# Altium PCB AudioBoxV2.PcbDoc
Units mil, origin at the board's own origin, x right, y up, seen from the top; angles counter-clockwise.
Board outline 3662 x 3550 mil, 4 copper layers (Top Layer, GND_2, VCC3, Bottom Layer), stack 23.756 mil thick; 185 components, 105 nets, 569 pads, 46 vias.
Unrouted connection lines stored in the file: 215.
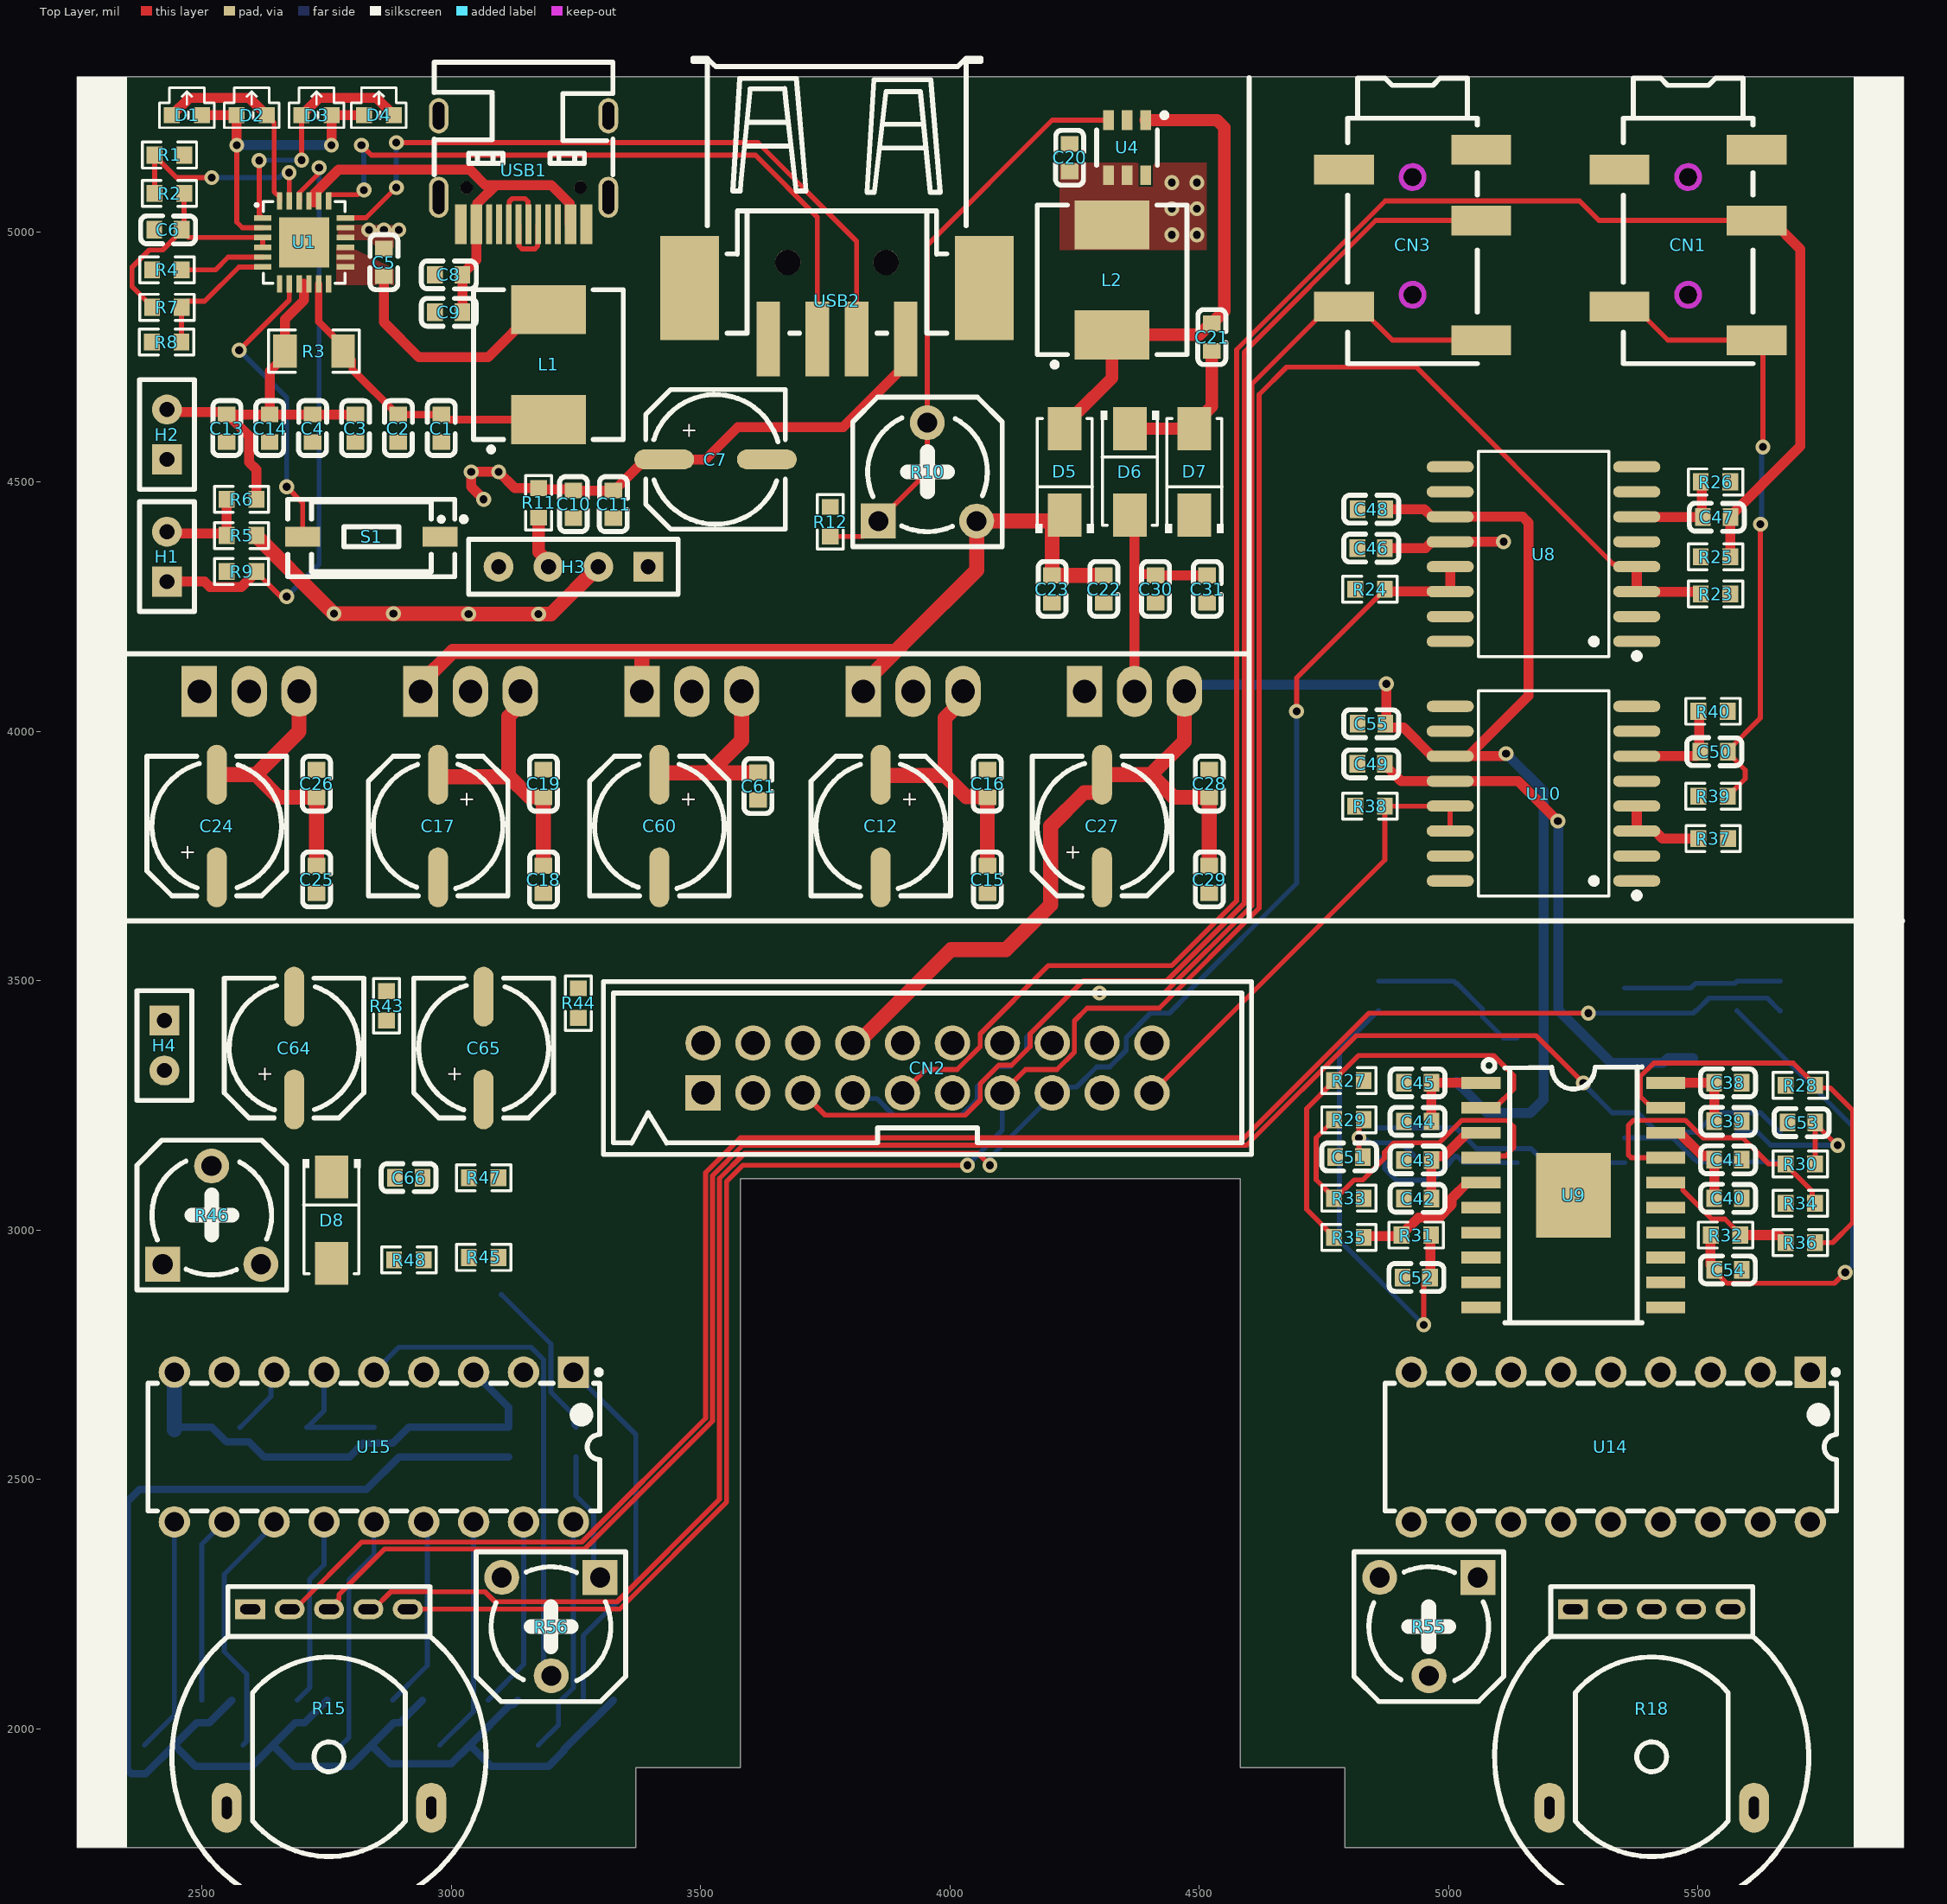
[diagram p0: Top Layer view]
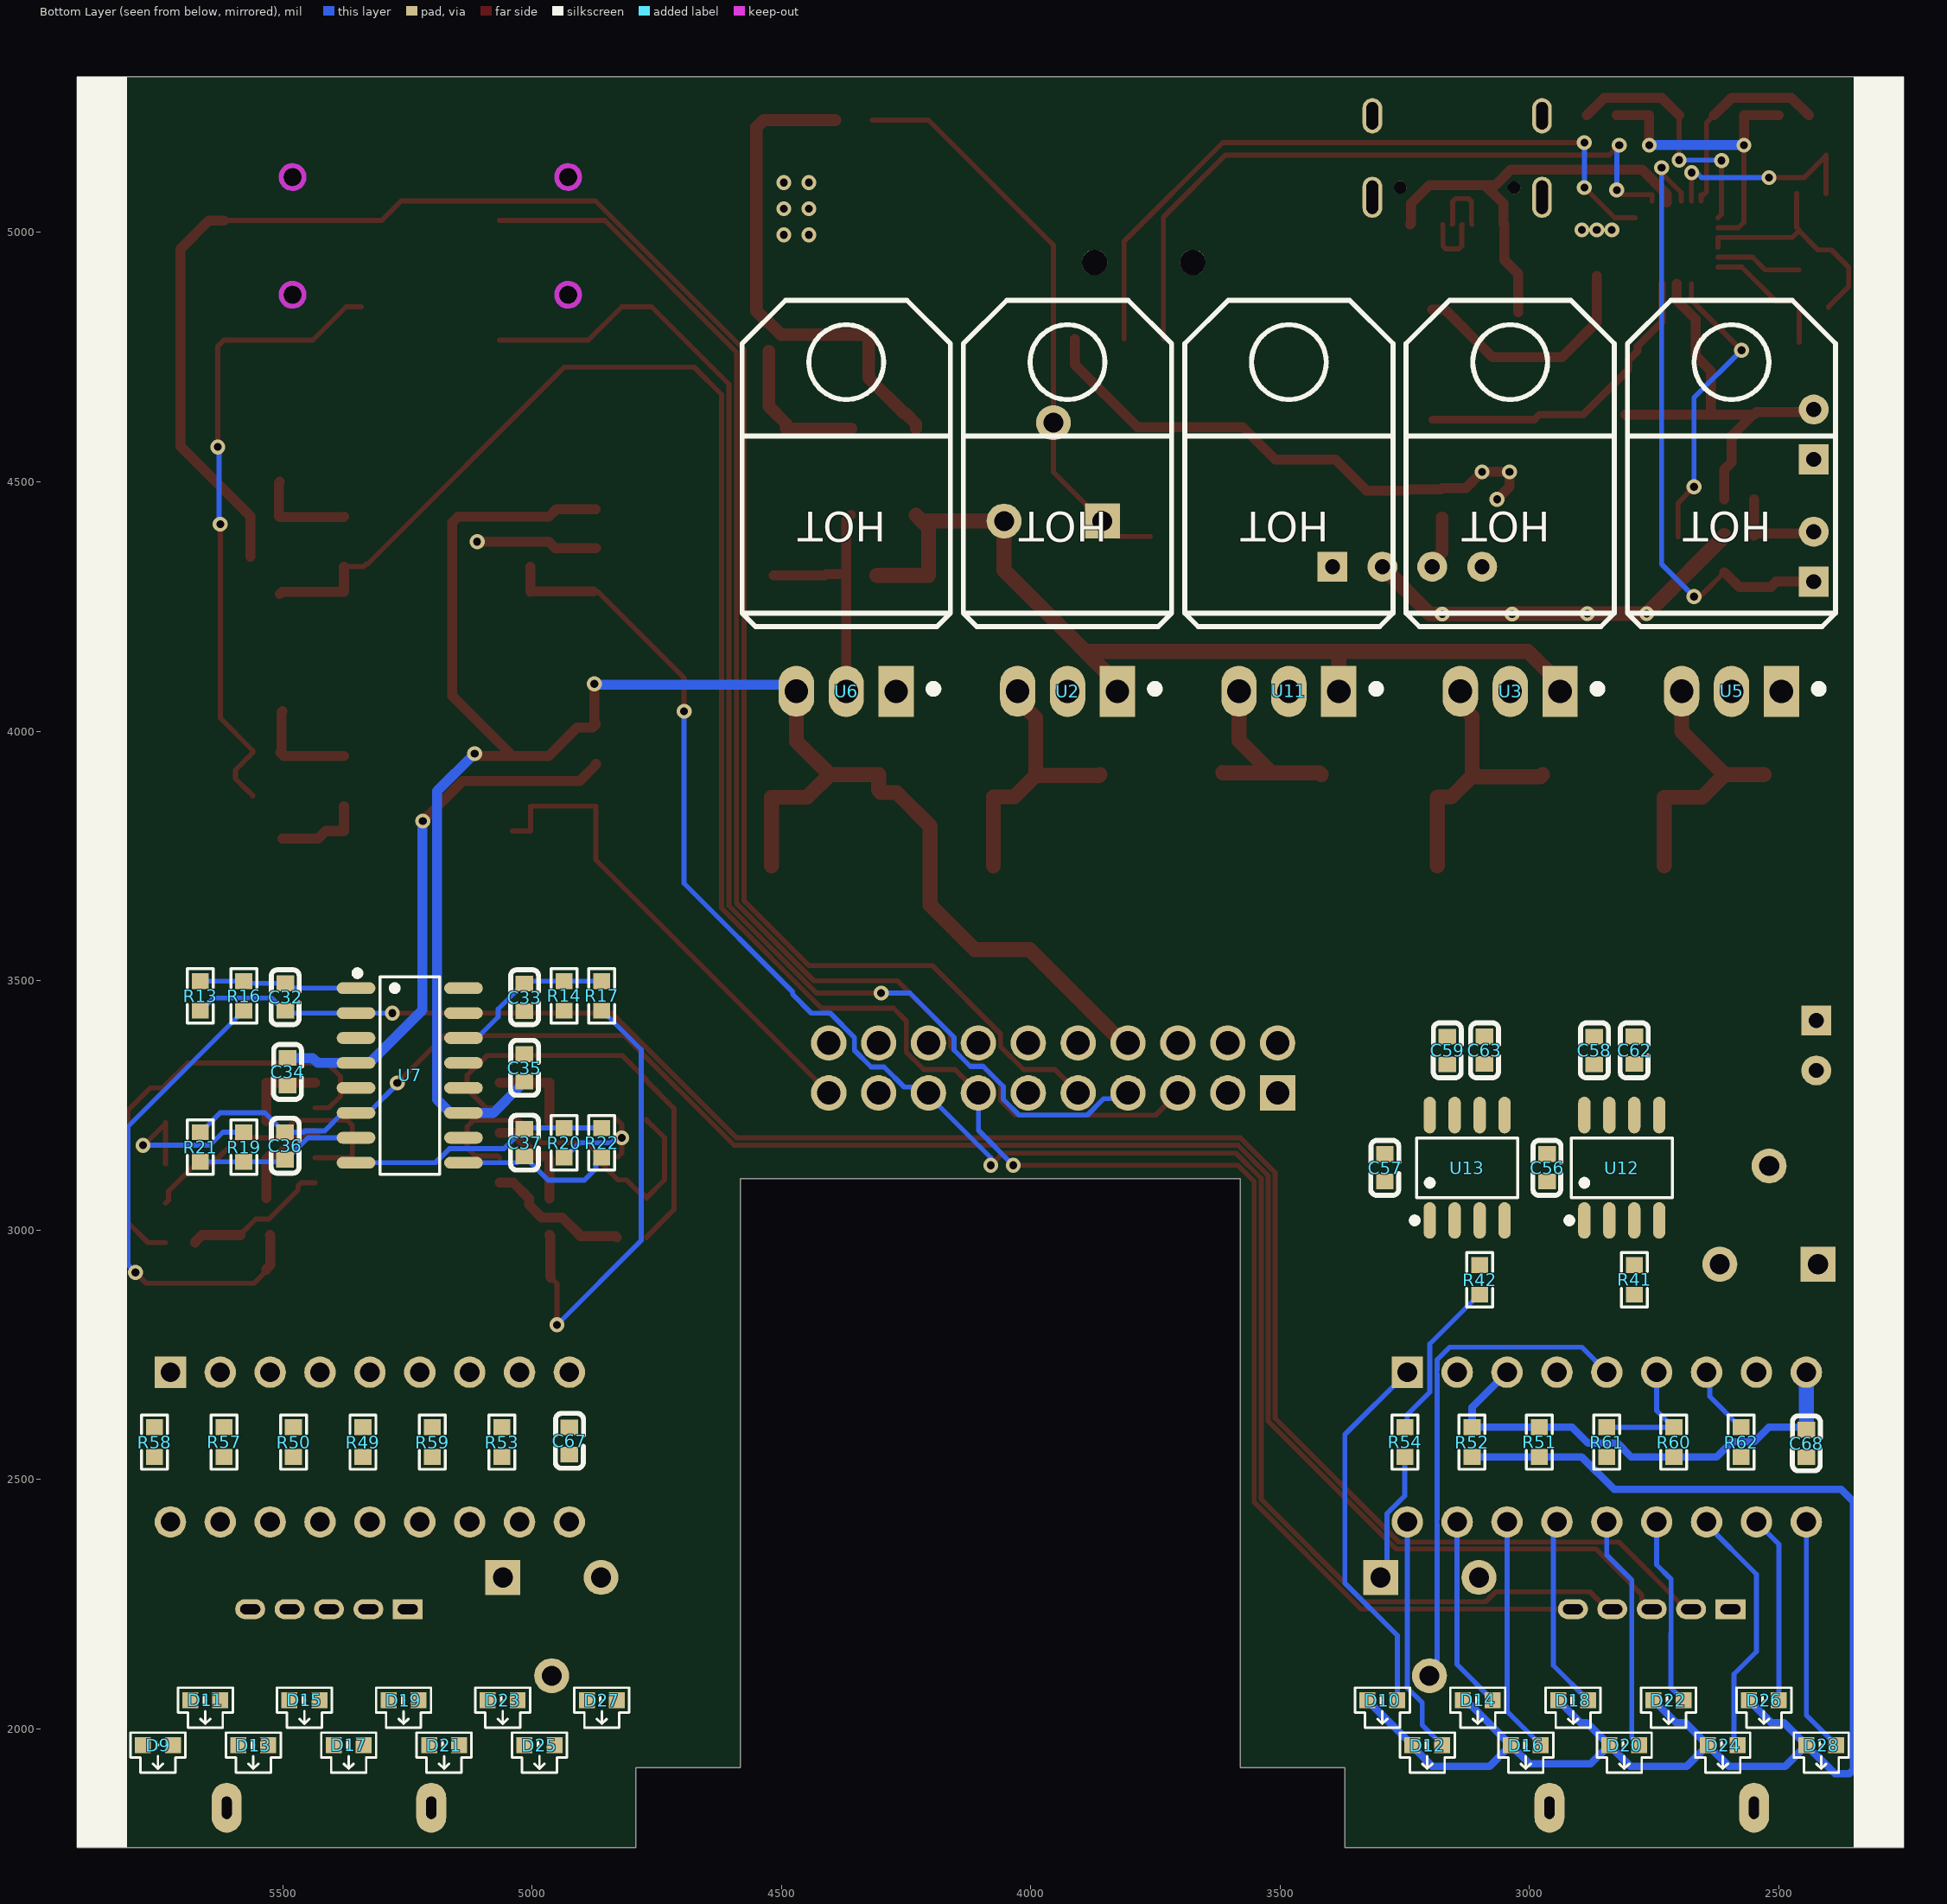
[diagram p1: Bottom Layer view, seen from below]
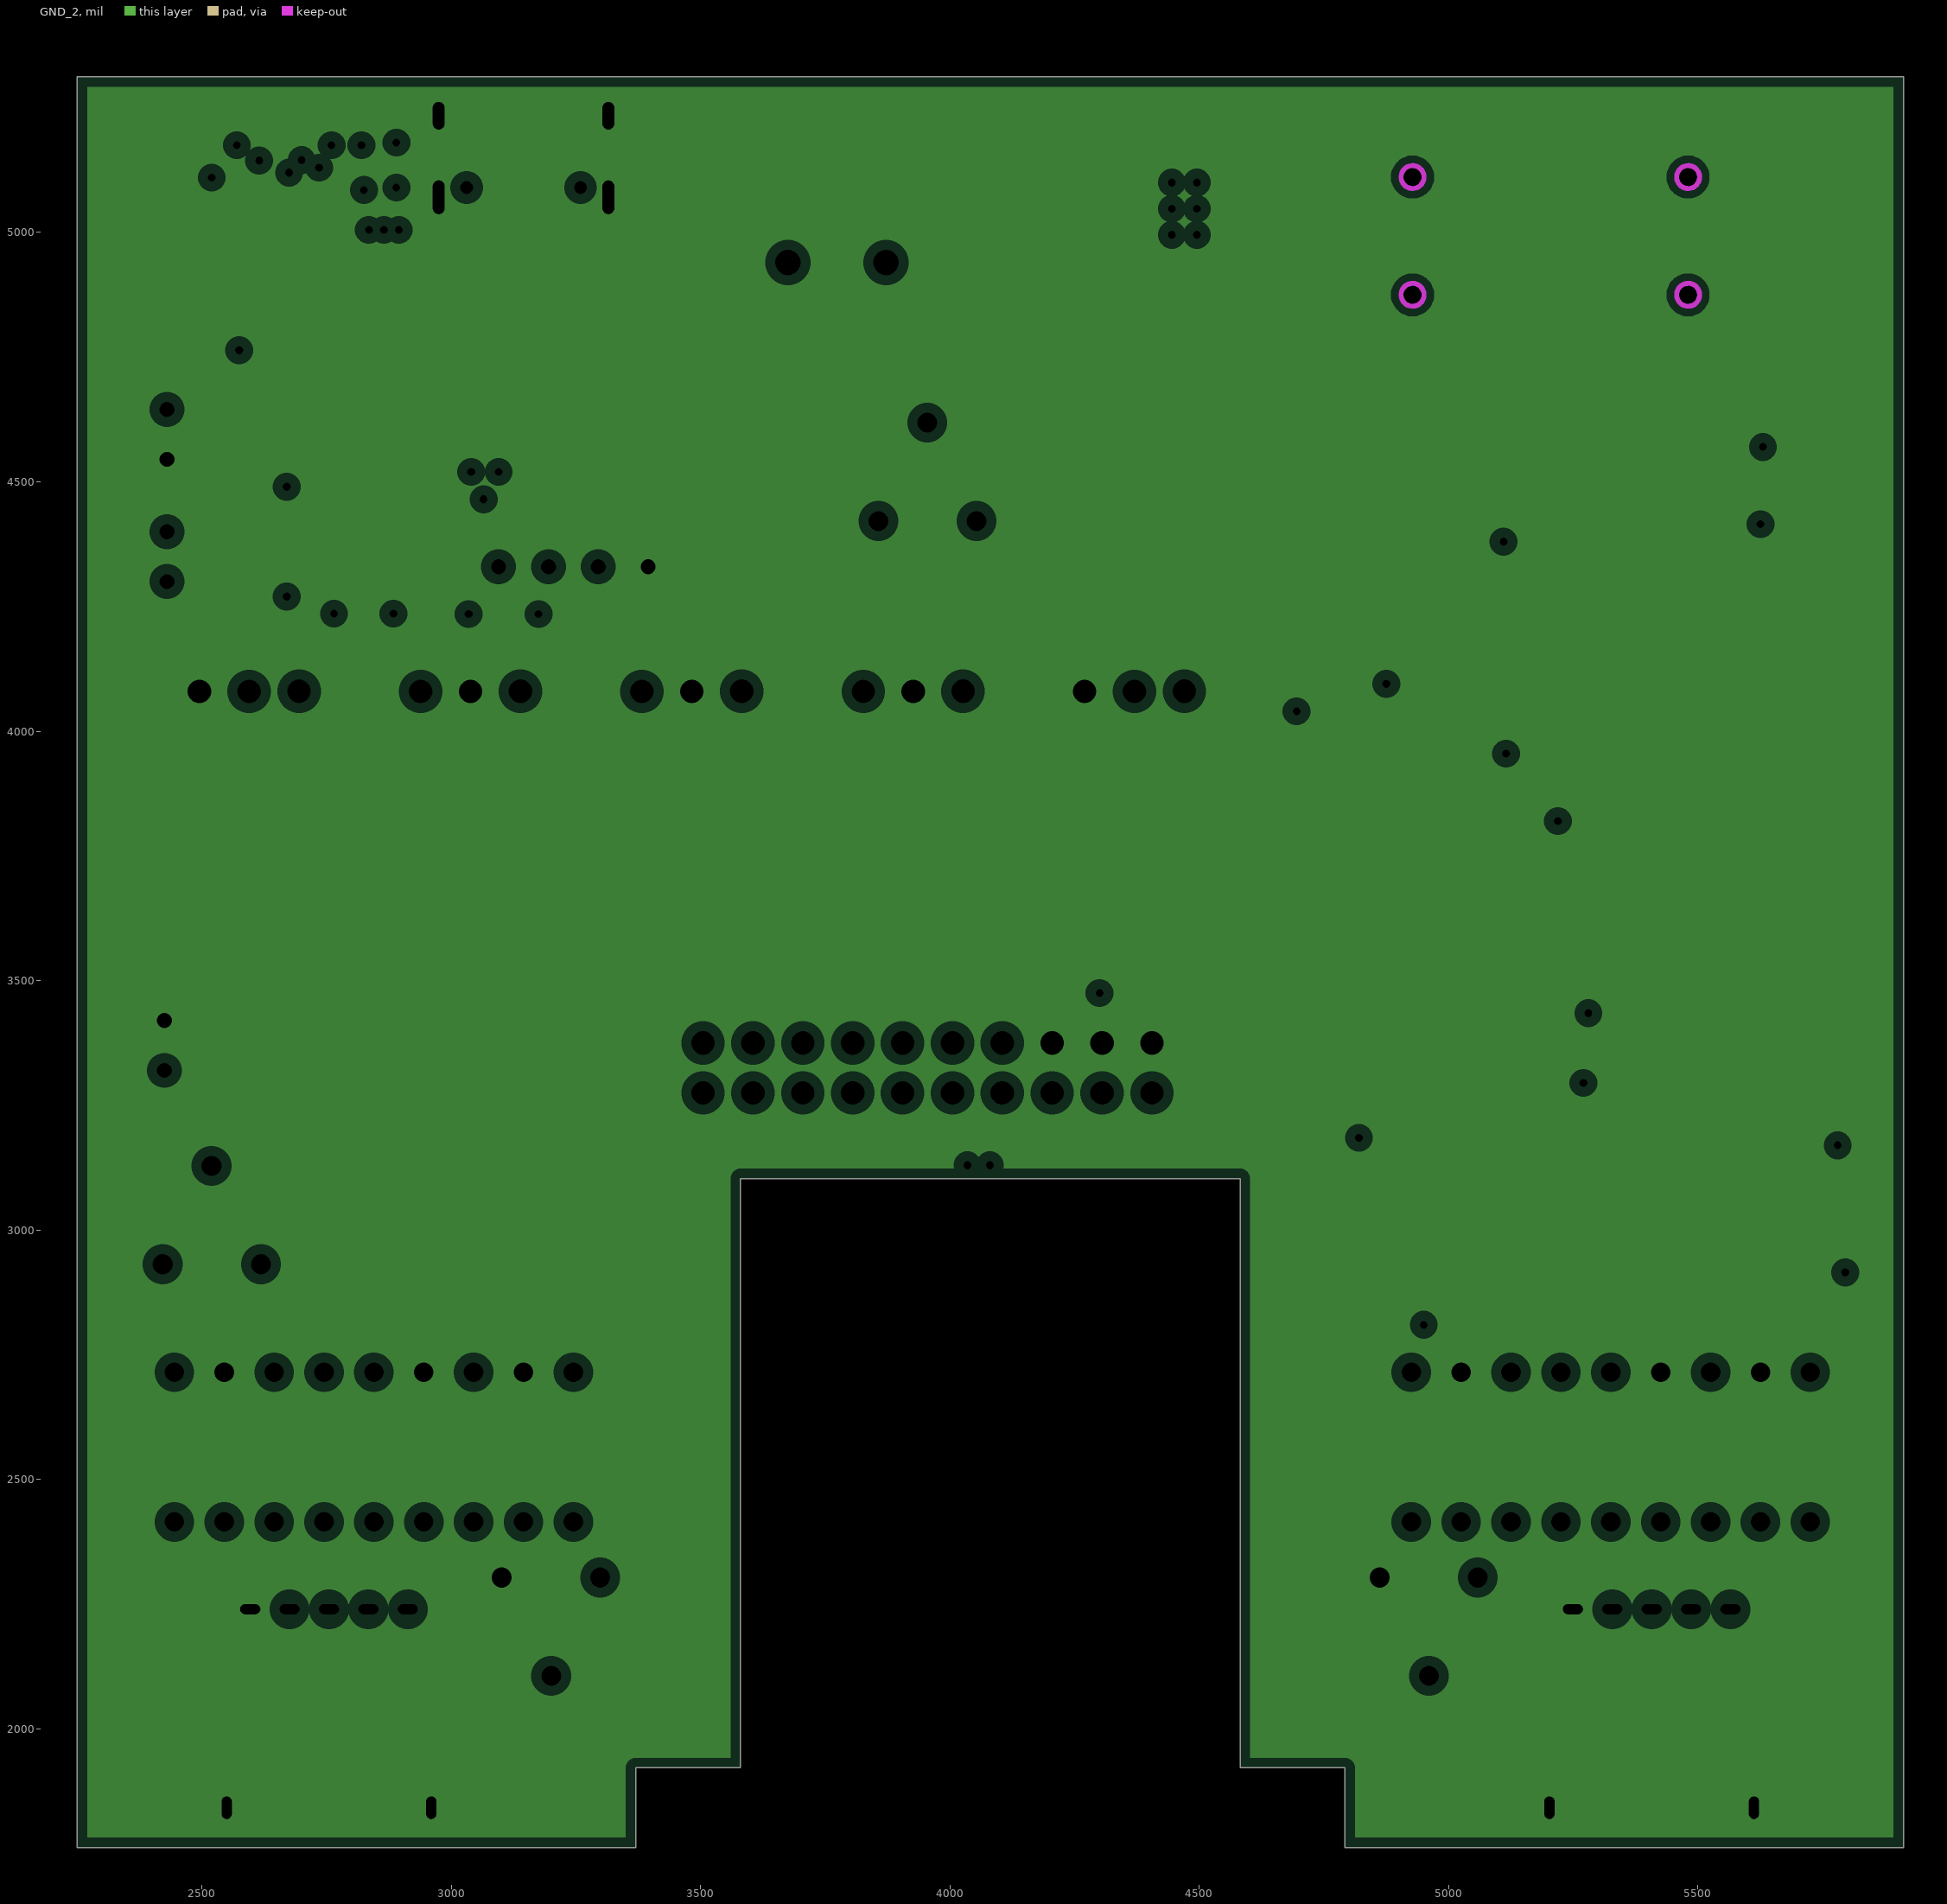
[diagram p2: GND_2, clearances drawn from the general rule]
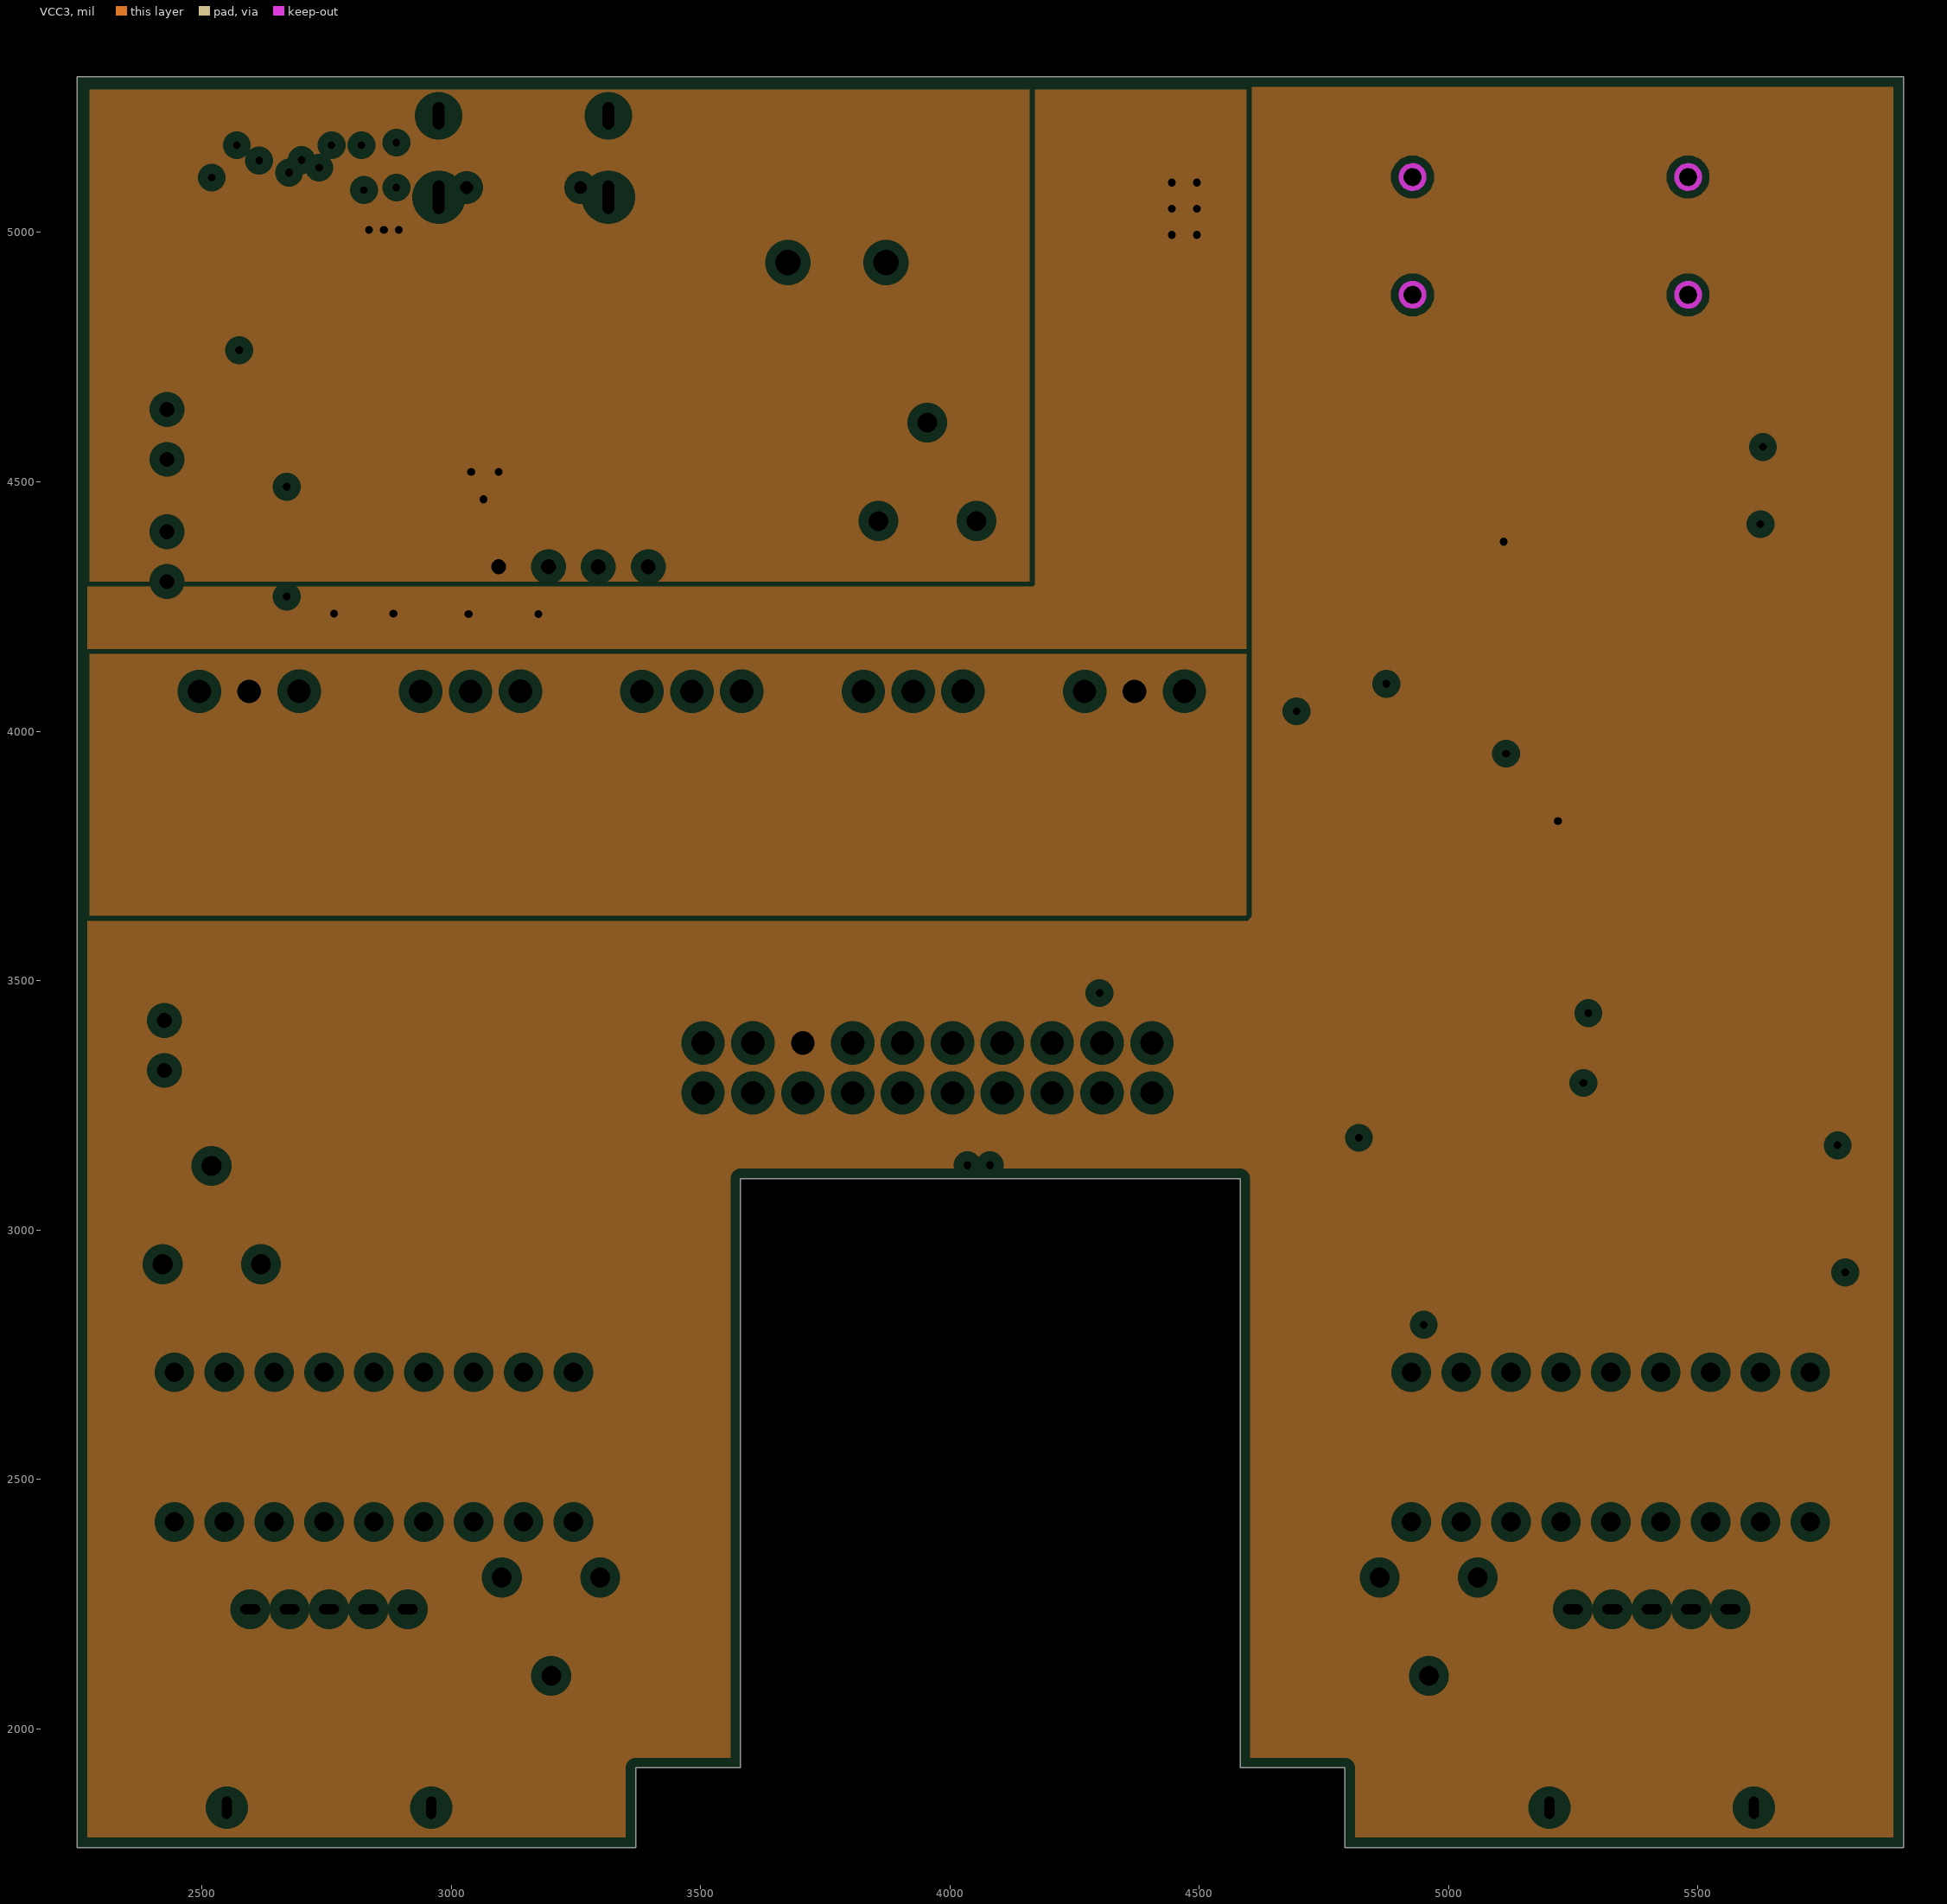
[diagram p3: VCC3, clearances drawn from the general rule]

## Layer stack, top to bottom
Top Solder: solder mask 0.4, Solder Resist, Dk 3.5
Top Layer: signal copper 1.4
Dielectric 2: prepreg 2.8, PP-006, Dk 4.1
GND_2: plane copper 1.378, net GND
Dielectric 1: dielectric 12.6, FR-4, Dk 4.8
VCC3: plane copper 1.378, net (Multiple Nets)
Dielectric 3: prepreg 2.8, PP-006, Dk 4.1
Bottom Layer: signal copper 1.4
Bottom Solder: solder mask 0.4, Solder Resist, Dk 3.5

## Board outline
2250,1762 2250,5312 5912,5312 5912,1762 4792,1762 4792,1922 4582,1922 4582,3103 3580,3103 3580,1922 3370,1922 3370,1762

## Design rules (kind name [scope] priority, off if disabled: settings)
Clearance [All] p1: gap=4 ignorepadtopadclearanceinfootprint=FALSE
ComponentClearance [All] p1 off: gap=10 collisioncheckmode=3 verticalgap=10 showdistances=FALSE
MinimumSolderMaskSliver [All] p1: minsoldermaskwidth=4
PlaneClearance [All] p1: clearance=20
PlaneConnect [All] p1: planeconnectstyle=Relief reliefexpansion=20 reliefentries=4 reliefconductorwidth=10 reliefairgap=10
PolygonConnect [All] p1: connectstyle=Direct reliefconductorwidth=10 reliefentries=4 polygonreliefangle="90 Angle" airgapwidth=10
RoutingVias [All] p1: holewidth=28 width=25 viastyle="Through Hole" minholewidth=16 minwidth=16 maxholewidth=100 maxwidth=100
SilkToSilkClearance [All] p1: silktosilkclearance=4
SilkToSolderMaskClearance [IsPad] p1: minsilkscreentomaskgap=4 clearancetoexposedcopper=TRUE
SolderMaskExpansion [All] p1: expansion=4 istentingtop=FALSE
Width PWR [InNetClass('PWR')] p1: maxlimit=50 minlimit=15 preferedwidth=25
Width [All] p2: maxlimit=50 minlimit=10 preferedwidth=15
24 further rules are at their usual default settings.

## Classes and differential pairs
net class PWR: A_VLB12V+ A_VLB12V- GND PWR_5V PWR_BAT PWR_DC_SW PWR_DC_V5+ PWR_DC_V5- PWR_DC_VHN PWR_DC_VHP PWR_SW PWR_VIN PWR_VOUT VU_12V
component class VU_LED: C56 C57 C58 C59 C60 C61 C62 C63 C64 C65 C66 C67 C68 D8 D9 D10 D11 D12 D13 D14 D15 D16 D17 D18 D19 D20 D21 D22 D23 D24 D25 D26 D27 D28 H4 R41 R42 R43 R44 R45 R46 R47 R48 R49 R50 R51 R52 R53 R54 R55 R56 R57 R58 R59 R60 R61 R62 U11 U12 U13 U14 U15
component class Power: C1 C2 C3 C4 C5 C6 C7 C8 C9 C10 C11 C12 C13 C14 C15 C16 C17 C18 C19 C20 C21 C22 C23 C24 C25 C26 C27 C28 C29 C30 C31 D1 D2 D3 D4 D5 D6 D7 H1 H2 H3 L1 L2 R1 R2 R3 R4 R5 R6 R7 R8 R9 R10 R11 R12 S1 U1 U2 U3 U4 U5 U6 USB1 USB2
component class Audio: C32 C33 C34 C35 C36 C37 C38 C39 C40 C41 C42 C43 C44 C45 C46 C47 C48 C49 C50 C51 C52 C53 C54 C55 CN1 CN2 CN3 R13 R14 R15 R16 R17 R18 R19 R20 R21 R22 R23 R24 R25 R26 R27 R28 R29 R30 R31 R32 R33 R34 R35 R36 R37 R38 R39 R40 U7 U8 U9 U10

## Components (designator, comment, footprint, x,y, rotation, side; value= is the part's Value field where it differs from the comment)
C1 "CAP" C0603 2980,4607.44 r270 top value=100nF
C2 "CAP" C0603 2894,4607.44 r270 top value=10uF
C3 "CAP" C0603 2808,4607.44 r270 top value=100nF
C4 "CAP" C0603 2722,4607.44 r270 top value=10uF
C5 "CAP" C0603 2865,4940 r270 top value=2.2nF
C6 "CAP" C0603 2432.2,5005.16 r180 top value=2.2uF
C7 "CAP_POL" CAP_SMD_6.3mm 3530,4545 r0 top value=220uF
C8 "CAP" C0603 2995,4915 r180 top value=10uF
C9 "CAP" C0603 2995,4840 r180 top value=100nF
C10 "CAP" C0603 3245,4455 r270 top value=10uF
C11 "CAP" C0603 3325,4455 r270 top value=100nF
C12 "CAP_POL" CAP_SMD_6.3mm 3861.25,3810 r270 top value=220uF
C13 "CAP" C0603 2550,4607.44 r270 top value=100nF
C14 "CAP" C0603 2636,4607.44 r270 top value=10uF
C15 "CAP" C0603 4075,3702.72 r270 top value=10uF
C16 "CAP" C0603 4075,3895.28 r90 top value=100nF
C17 "CAP_POL" CAP_SMD_6.3mm 2973.75,3810 r270 top value=220uF
C18 "CAP" C0603 3185,3702.72 r270 top value=10uF
C19 "CAP" C0603 3185,3895.28 r90 top value=100nF
C20 "CAP" C0603 4240,5150 r90 top value=1uF
C21 "CAP" C0603 4525,4790 r270 top value=1uF
C22 "CAP" C0603 4308.43,4285 r270 top value=10uF
C23 "CAP" C0603 4204.79,4285 r270 top value=100nF
C24 "CAP_POL" CAP_SMD_6.3mm 2530,3810 r90 top value=220uF
C25 "CAP" C0603 2730,3702.72 r270 top value=10uF
C26 "CAP" C0603 2730,3895 r90 top value=100nF
C27 "CAP_POL" CAP_SMD_6.3mm 4305,3810 r90 top value=220uF
C28 "CAP" C0603 4520,3895.28 r90 top value=10uF
C29 "CAP" C0603 4520,3702.72 r270 top value=100nF
C30 "CAP" C0603 4412.07,4285 r270 top value=10uF
C31 "CAP" C0603 4515.71,4285 r270 top value=100nF
C32 "Cap" C0603 5494.79,3467.09 r90 bottom value=1nF
C33 "Cap" C0603 5015,3466.48 r270 bottom value=1nF
C34 "CAP" C0603 5490,3317.45 r90 bottom value=1uF
C35 "CAP" C0603 5015,3325 r270 bottom value=1uF
C36 "Cap" C0603 5495,3168.84 r270 bottom value=1nF
C37 "Cap" C0603 5015,3175 r270 bottom value=1nF
C38 "CAP" C0603 5559.73,3295.21 r180 top value=1uF
C39 "CAP" C0603 5559.73,3218.04 r180 top value=100nF
C40 "CAP" C0603 5559.73,3063.68 r180 top value=1uF
C41 "CAP" C0603 5559.73,3140.86 r180 top value=100nF
C42 "CAP" C0603 4937.8,3063.47 r0 top value=1uF
C43 "CAP" C0603 4937.8,3140.65 r0 top value=100nF
C44 "CAP" C0603 4937.8,3217.82 r0 top value=1uF
C45 "CAP" C0603 4937.8,3295 r0 top value=100nF
C46 "CAP" C0603 4844.39,4367.19 r180 top value=1uF
C47 "CAP" C0603 5537.19,4429.16 r180 top value=1uF
C48 "CAP" C0603 4845,4445 r0 top value=1uF
C49 "CAP" C0603 4844.39,3934.69 r180 top value=1uF
C50 "CAP" C0603 5532.19,3959.16 r180 top value=1uF
C51 "CAP" C0603 4800,3146.66 r180 top value=1uF
C52 "CAP" C0603 4935,2905 r180 top value=1uF
C53 "CAP" C0603 5707.19,3215.41 r180 top value=1uF
C54 "CAP" C0603 5560,2920 r0 top value=1uF
C55 "CAP" C0603 4845,4015 r0 top value=1uF
C56 "CAP" C0603 2965,3125 r90 bottom value=10uF
C57 "CAP" C0603 3290,3125 r90 bottom value=10uF
C58 "CAP" C0603 2870,3360 r270 bottom value=4.7uF
C59 "CAP" C0603 3165,3360 r270 bottom value=4.7uF
C60 "CAP_POL" CAP_SMD_6.3mm 3417.5,3810 r270 top value=220uF
C61 "CAP" C0603 3615,3890 r270 top value=1uF
C62 "CAP" C0603 2790,3360.61 r90 bottom value=1uF
C63 "CAP" C0603 3090,3360.61 r90 bottom value=1uF
C64 "CAP_POL" CAP_SMD_6.3mm 2685,3365 r90 top value=220uF
C65 "CAP_POL" CAP_SMD_6.3mm 3065,3365 r90 top value=220uF
C66 "CAP" C0603 2915,3105 r0 top value=1uF
C67 "CAP" C0603 4925,2577.19 r270 bottom value=10uF
C68 "CAP" C0603 2445,2572.2 r270 bottom value=10uF
CN1 "Audio3.5Con" Audio3.5_3Pin 5480,4975 r270 top
CN2 "300S-20P" DC_20P_2.54 3955,3325 r0 top
CN3 "Audio3.5Con" Audio3.5_3Pin 4927.5,4975 r270 top
D1 "LED" LED0603_Side 2470,5235 r90 top
D2 "LED" LED0603_Side 2600,5235 r90 top
D3 "LED" LED0603_Side 2730,5235 r90 top
D4 "LED" LED0603_Side 2855,5235 r90 top
D5 "Diode SBD" SMA_L4.3 4230,4520 r90 top
D6 "Diode SBD" SMA_L4.3 4360.72,4520 r270 top
D7 "Diode SBD" SMA_L4.3 4490,4520 r90 top
D8 "Diode SBD" SMA_L4.3 2760,3020 r270 top
D9 "LED" LED0603_Side 5750,1967.5 r270 bottom
D10 "LED" LED0603_Side 3295,2057.5 r270 bottom
D11 "LED" LED0603_Side 5655,2057.5 r270 bottom
D12 "LED" LED0603_Side 3205,1967.5 r270 bottom
D13 "LED" LED0603_Side 5558.75,1967.5 r270 bottom
D14 "LED" LED0603_Side 3103.75,2057.5 r270 bottom
D15 "LED" LED0603_Side 5456.25,2057.5 r270 bottom
D16 "LED" LED0603_Side 3007.5,1967.5 r270 bottom
D17 "LED" LED0603_Side 5367.5,1967.5 r270 bottom
D18 "LED" LED0603_Side 2912.5,2057.5 r270 bottom
D19 "LED" LED0603_Side 5257.5,2057.5 r270 bottom
D20 "LED" LED0603_Side 2810,1967.5 r270 bottom
D21 "LED" LED0603_Side 5176.25,1967.5 r270 bottom
D22 "LED" LED0603_Side 2721.25,2057.5 r270 bottom
D23 "LED" LED0603_Side 5058.75,2057.5 r270 bottom
D24 "LED" LED0603_Side 2612.5,1967.5 r270 bottom
D25 "LED" LED0603_Side 4985,1967.5 r270 bottom
D26 "LED" LED0603_Side 2530,2057.5 r270 bottom
D27 "LED" LED0603_Side 4860,2057.5 r270 bottom
D28 "LED" LED0603_Side 2415,1967.5 r270 bottom
H1 "Header_P2" H_2.54_P2 2430,4350 r90 top
H2 "Header_P2" H_2.54_P2 2430,4595 r90 top
H3 "Header_P4" H_2.54_P4 3245,4330 r180 top
H4 "Header_P2" H_2.54_P2 2425,3370 r270 top
L1 "INDU" SMD_L7.1 3195,4735 r90 top value=1uH
L2 "INDU" SMD_L7.1 4325,4905 r90 top
R1 "Reg" R0603 2435,5155 r0 top value=0R
R2 "Reg" R0603 2435,5078 r0 top value=0R
R3 "Reg" R1206 2725,4762.32 r180 top value=0.01R
R4 "Reg" R0603 2430,4925 r180 top value=100K
R5 "Reg" R0603 2579.66,4392.5 r0 top value=1K
R6 "Reg" R0603 2579.66,4465 r0 top value=1K
R7 "Reg" R0603 2430,4850 r0 top value=2M
R8 "Reg" R0603 2429.66,4780 r180 top value=1M
R9 "Reg" R0603 2579.66,4320 r0 top value=0R
R10 "Res Tap" RES_TAP_HOR 3955,4520 r0 top value=10K
R11 "Reg" R0603 3175,4457.8 r270 top value=1K
R12 "Reg" R0603 3760,4420 r270 top value=300R
R13 "Reg" R0603 5665,3469.28 r90 bottom value=1K
R14 "Reg" R0603 4935.42,3469.28 r270 bottom value=1K
R15 "Res_Tap_2" RES_TAP_5Pin 2755,2041 r180 top
R16 "Reg" R0603 5577.92,3469.28 r270 bottom value=500R
R17 "Reg" R0603 4860,3469.28 r270 bottom value=500R
R18 "Res_Tap_2" RES_TAP_5Pin 5407,2041 r180 top
R19 "Reg" R0603 5577.92,3166.65 r270 bottom value=500R
R20 "Reg" R0603 4935.42,3175 r90 bottom value=500R
R21 "Reg" R0603 5665,3166.65 r270 bottom value=1K
R22 "Reg" R0603 4860,3175 r270 bottom value=1K
R23 "Reg" R0603 5535,4275 r0 top value=5K
R24 "Reg" R0603 4842.2,4285 r0 top value=5K
R25 "Reg" R0603 5535,4350 r0 top value=10K
R26 "Reg" R0603 5535,4500 r180 top value=10K
R27 "Reg" R0603 4800,3300 r180 top value=50R
R28 "Reg" R0603 5705,3290 r180 top value=50R
R29 "Reg" R0603 4800,3221.25 r180 top value=500R
R30 "Reg" R0603 5705,3132.5 r180 top value=500R
R31 "Reg" R0603 4935,2990 r180 top value=500R
R32 "Reg" R0603 5555,2990 r0 top value=500R
R33 "Reg" R0603 4800,3063.75 r180 top value=1K
R34 "Reg" R0603 5705,3053.75 r0 top value=1K
R35 "Reg" R0603 4800,2985 r0 top value=1K
R36 "Reg" R0603 5705,2975 r180 top value=1K
R37 "Reg" R0603 5530.35,3785 r0 top value=5K
R38 "Reg" R0603 4842.2,3850 r0 top value=5K
R39 "Reg" R0603 5530,3870 r0 top value=10K
R40 "Reg" R0603 5530,4040 r180 top value=10K
R41 "Reg" R0603 2790,2900 r270 bottom value=10K
R42 "Reg" R0603 3100,2900 r270 bottom value=10K
R43 "Reg" R0603 2870,3449.66 r90 top value=0R
R44 "Reg" R0603 3255,3455 r90 top value=0R
R45 "Reg" R0603 3065,2945 r180 top value=1K
R46 "Res Tap" RES_TAP_HOR 2520,3030 r0 top value=1K
R47 "Reg" R0603 3065,3105 r180 top value=1K
R48 "Reg" R0603 2915,2940 r0 top value=10K
R49 "Reg" R0603 5338.93,2575 r90 bottom value=500R
R50 "Reg" R0603 5478.29,2575 r90 bottom value=500R
R51 "Reg" R0603 2980.28,2575 r90 bottom value=500R
R52 "Reg" R0603 3115.14,2575 r90 bottom value=500R
R53 "Reg" R0603 5060.2,2575 r90 bottom value=10K
R54 "Reg" R0603 3250,2575 r90 bottom value=10K
R55 "Res Tap" RES_TAP_HOR 4960,2205 r180 top value=50K
R56 "Res Tap" RES_TAP_HOR 3200,2205 r180 top value=50K
R57 "Reg" R0603 5617.65,2575 r90 bottom value=20K
R58 "Reg" R0603 5757.01,2575 r90 bottom value=500R
R59 "Reg" R0603 5199.56,2575 r270 bottom value=1K
R60 "Reg" R0603 2710.56,2575 r270 bottom value=20K
R61 "Reg" R0603 2845.42,2575 r270 bottom value=500R
R62 "Reg" R0603 2575.7,2575 r270 bottom value=1K
S1 "KEY-2P" KEY_SOT_P2 2840,4390 r0 top
U1 "IP5209" QFN-24 2705,4980 r270 top
U2 "LM78XX" TO-220-3_2.54_HOR 3926.25,4080 r0 bottom locked
U3 "LM78XX" TO-220-3_2.54_HOR 3038.75,4080 r0 bottom locked
U4 "SX1308" SOT-23-6 4355,5170 r90 top
U5 "LM79XX" TO-220-3_2.54_HOR 2595,4080 r0 bottom locked
U6 "LM79XX" TO-220-3_2.54_HOR 4370,4080 r0 bottom locked
U7 "OPA4134UA" SOIC-16_5.4mm 5245,3310 r270 bottom
U8 "DRV134UA" SOIC-16_9.5mm 5190,4355 r90 top
U9 "TPA6120A2DWP" HSOP-20 5250,3070 r270 top
U10 "DRV134UA" SOIC-16_9.5mm 5190,3875 r90 top
U11 "LM78XX" TO-220-3_2.54_HOR 3482.5,4080 r0 bottom locked
U12 "LM386D" SOP-8 2815,3125 r180 bottom
U13 "LM386D" SOP-8 3125,3125 r180 bottom
U14 "XD3915" DIP-18 5325,2565 r180 top
U15 "XD3915" DIP-18 2845,2565 r180 top
USB1 "TYPEC-304-ACP16" USB-C-SMD_TYPE-C-16P 3145,5130 r180 top
USB2 "USB_TypeA母座" USB_TYPEA-SMD 3773.42,4863.23 r180 top

## Footprints (in the part's own frame and the unit in brackets; to place one, negate y for a bottom-side part, rotate by r counter-clockwise, add the part's x,y. Pads: shape width x height; smd on the part's side, far side on the other; paste and mask are expansions set on the pad)
Audio3.5_3Pin [mil] "3.5mm3Pin音频接口"
  rect 60x120 smd: 1(-191,137.5) 2(191,137.5) 3(124,-137.5) 4(-49,137.5) 5(-151,-137.5)
  Keep-Out Layer board cut-out: 77,0 78.75,-8.8 83.74,-16.26 91.2,-21.25 100,-23 100,-23 108.8,-21.25 116.26,-16.26 121.25,-8.8 123,0 123,0 121.25,8.8 116.26,16.26 108.8,21.25 100,23 100,23 91.2,21.25 83.74,16.26 78.75,8.8 77,0
  Keep-Out Layer board cut-out: -136,-23 -144.8,-21.25 -152.26,-16.26 -157.25,-8.8 -159,0 -159,0 -157.25,8.8 -152.26,16.26 -144.8,21.25 -136,23 -136,23 -127.2,21.25 -119.74,16.26 -114.75,8.8 -113,0 -113,0 -114.75,-8.8 -119.74,-16.26 -127.2,-21.25 -136,-23
  Keep-Out Layer circle w10: c-136,0 r23
  Keep-Out Layer circle w10: c100,0 r23
  silkscreen extent -334,-130 238,130, body extent -389,-179 359,175, height 218
C0603 [mm]
  rect 0.8x0.9 smd: 1(-0.7,0) 2(0.7,0)
  silkscreen extent -1.41,-0.71 1.39,0.72, body extent -0.8,-0.41 0.8,0.45, height 0.89
CAP_SMD_6.3mm [mil] "SMD电容,10mm"
  oval 120x40 smd: 1(-103,0) 2(103,0)
  silkscreen extent -140,-140 140,140, body extent -137,-130 139,130, height 154
DC_20P_2.54 [mm] "牛角座2.54，20P"
  rect 1.8x1.8 hole 1.2: 1(-11.43,-1.27)
  round 1.8 hole 1.2: 2(-11.43,1.27) 3(-8.89,-1.27) 4(-8.89,1.27) 5(-6.35,-1.27) 6(-6.35,1.27) 7(-3.81,-1.27) 8(-3.81,1.27) 9(-1.27,-1.27) 10(-1.27,1.27) 11(1.27,-1.27) 12(1.27,1.27) 13(3.81,-1.27) 14(3.81,1.27) 15(6.35,-1.27) 16(6.35,1.27) 17(8.89,-1.27) 18(8.89,1.27) 19(11.43,-1.27) 20(11.43,1.27)
  silkscreen extent -16.5,-4.4 16.5,4.4
DIP-18 [mm]
  rect 1.6x1.6 hole 1: 1(-10.16,-3.81)
  round 1.6 hole 1: 2(-7.62,-3.81) 3(-5.08,-3.81) 4(-2.54,-3.81) 5(0,-3.81) 6(2.54,-3.81) 7(5.08,-3.81) 8(7.62,-3.81) 9(10.16,-3.81) 10(10.16,3.81) 11(7.62,3.81) 12(5.08,3.81) 13(2.54,3.81) 14(0,3.81) 15(-2.54,3.81) 16(-5.08,3.81) 17(-7.62,3.81) 18(-10.16,3.81)
  silkscreen extent -11.58,-3.93 11.5,3.25, body extent -11,-3.81 11,4.06, height 5
H_2.54_P2 [mil] "2Pin Header"
  rect 60x60 hole 30: 1(-50,0)
  round 60 hole 30: 2(50,0)
  silkscreen extent -110,-55 110,55, body extent -100,-50 100,50, height 336
H_2.54_P4 [mil]
  rect 60x60 hole 30: 1(-150,0)
  round 60 hole 30: 2(-50,0) 3(50,0) 4(150,0)
  silkscreen extent -210,-55 210,55, body extent -200,-45 100,55, height 315
HSOP-20 [mm]
  rect 0.6x2 smd: 1(-5.715,-4.7) 2(-4.445,-4.7) 3(-3.175,-4.7) 4(-1.905,-4.7) 5(-0.635,-4.7) 6(0.635,-4.7) 7(1.905,-4.7) 8(3.175,-4.7) 9(4.445,-4.7) 10(5.715,-4.7) 11(5.715,4.7) 12(4.445,4.7) 13(3.175,4.7) 14(1.905,4.7) 15(0.635,4.7) 16(-0.635,4.7) 17(-1.905,4.7) 18(-3.175,4.7) 19(-4.445,4.7) 20(-5.715,4.7)
  rect 4.32x3.81 smd: 21(0,0)
  silkscreen extent -6.9,-4.6 6.5,3.5
KEY_SOT_P2 [mil] "KEY_SOT_P2"
  rect 70x40 smd: 1(137.8,0) 2(-137.8,0)
  silkscreen extent -168,-80 190,75, body extent -162,-72 159,70, height 98
LED0603_Side [mil]
  rect 32x32 smd: 1(0,30) 2(0,-30)
  silkscreen extent -25,-55 55,55
QFN-24 [mm]
  rect 0.28x0.889 smd mask+0.076: 1(-1.25,-2.111) 2(-0.75,-2.111) 3(-0.25,-2.111) 4(0.25,-2.111) 5(0.75,-2.111) 6(1.25,-2.111) 13(1.25,2.111) 14(0.75,2.111) 15(0.25,2.111) 16(-0.25,2.111) 17(-0.75,2.111) 18(-1.25,2.111)
  rect 0.889x0.28 smd mask+0.076: 7(2.111,-1.25) 8(2.111,-0.75) 9(2.111,-0.25) 10(2.111,0.25) 11(2.111,0.75) 12(2.111,1.25) 19(-2.111,1.25) 20(-2.111,0.75) 21(-2.111,0.25) 22(-2.111,-0.25) 23(-2.111,-0.75) 24(-2.111,-1.25)
  rect 2.55x2.55 smd: 25(0,0)
  silkscreen extent -2.08,-2.49 2.08,2.08, body extent -2,-2 2,2, height 0.9
R0603 [mil]
  rect 31.75x34.02 smd: 1(-29.66,0) 2(29.66,0)
  silkscreen extent -55,-26 55,26, body extent -31,-17 32,17, height 19
R1206 [mil]
  rect 47.54x66.97 smd: 1(-58.22,0) 2(58.22,0)
  silkscreen extent -91,-42 91,42, body extent -63,-31 63,32, height 22
RES_TAP_5Pin [mil] "双联电位器"
  rect 60x40 hole 20 slot 40 at 0 deg: 1(158,-199)
  oval 60x40 hole 20 slot 40 at 0 deg: 2(79,-199) 3(0,-199) 4(-79,-199) 5(-158,-199)
  oval 60x100 hole 45 slot 20 at 0 deg: 6(-205,199) 6(205,199)
  silkscreen extent -315,-244 315,412
RES_TAP_HOR [mil] "卧式电位器"
  rect 70x70 hole 40: 1(-98.5,-98.5)
  round 70 hole 40: 2(98.5,-98.5) 3(-0.5,98.5)
  silkscreen extent -150,-150 150,150
SMA_L4.3 [mm] "SMA_DIode"
  rect 2.185x1.7 smd: 1(-2.2,0) 2(2.2,0)
  silkscreen extent -3.11,-1.48 2.73,1.48, body extent -2.6,-1.3 2.6,1.3, height 2.4
SMD_L7.1 [mm]
  rect 2.5x3.8 smd: 1(-2.8,0) 2(2.8,0)
  silkscreen extent -4.44,-3.81 3.81,3.81, body extent -3.65,-3.3 3.65,3.3, height 4.95
SOIC-16_5.4mm [mil] "SOIC_16"
  oval 23.7x77.6 smd: 1(-175,-107.7) 2(-125,-107.7) 3(-75,-107.7) 4(-25,-107.7) 5(25,-107.7) 6(75,-107.7) 7(125,-107.7) 8(175,-107.7) 9(175,107.7) 10(125,107.7) 11(75,107.7) 12(25,107.7) 13(-25,107.7) 14(-75,107.7) 15(-125,107.7) 16(-175,107.7)
  silkscreen extent -211,-111 198,60, body extent -195,-118 195,118, height 58
SOIC-16_9.5mm [mil]
  oval 22.6x94.51 smd: 1(-175,-187.02) 2(-125,-187.02) 3(-75,-187.02) 4(-25,-187.02) 5(25,-187.02) 6(75,-187.02) 7(125,-187.02) 8(175,-187.02) 9(175,187.02) 10(125,187.02) 11(75,187.02) 12(25,187.02) 13(-25,187.02) 14(-75,187.02) 15(-125,187.02) 16(-175,187.02)
  silkscreen extent -210,-193 206,131
SOP-8 [mm]
  oval 0.63x1.865 smd: 1(-1.905,-2.682) 2(-0.635,-2.682) 3(0.635,-2.682) 4(1.905,-2.682) 5(1.905,2.682) 6(0.635,2.682) 7(-0.635,2.682) 8(-1.905,2.682)
  silkscreen extent -2.82,-2.83 2.58,1.52, body extent -2.49,-2.92 2.41,3.06, height 1.58
SOT-23-6 [mm]
  rect 1x0.55 smd: 1(1.4,-0.95) 2(1.4,0) 3(1.4,0.95) 4(-1.4,0.95) 5(-1.4,0) 6(-1.4,-0.95)
  silkscreen extent -0.9,-2.03 1.78,1.55, body extent -1.21,-1.4 1.21,1.4, height 1.09
TO-220-3_2.54_HOR [mm]
  rect 1.8x2.6 hole 1.2: 1(-2.54,0.005)
  oval 1.8x2.6 hole 1.2: 2(0,0.005) 3(2.54,-0.005)
  silkscreen extent -5.3,-19.92 5.3,0.07
USB-C-SMD_TYPE-C-16P [mm] "全引脚USB TYPEC母座"
  rect 0.6x2.032 smd: A1B12(-3.2,2.893) A4B9(-2.4,2.893) B1A12(3.2,2.893) B4A9(2.4,2.893)
  rect 0.3x2.032 smd: A5(-1.25,2.893) A6(-0.25,2.893) A7(0.25,2.893) A8(1.25,2.893) B5(1.75,2.893) B6(0.75,2.893) B7(-0.75,2.893) B8(-1.75,2.893)
  oval 1x1.8 hole 0.6 slot 1.4 at 90 deg: EP(-4.32,-2.639) EP(4.32,-2.639)
  oval 1x2.1 hole 0.6 slot 1.7 at 90 deg: EP(-4.32,1.511) EP(4.32,1.511)
  round 0.65 hole 0.65 unplated: ""(-2.9,1.011) ""(2.9,1.021)
  silkscreen extent -4.55,-5.37 4.55,0.36, body extent -4.47,-5.32 4.47,2.58, height 3.13
USB_TYPEA-SMD [mm] "USBA母座"
  rect 1.2x3.8 smd: 1(-3.505,1.95) 2(-1.005,1.95) 3(0.996,1.95) 4(3.496,1.95)
  rect 3x5.3 smd: 5(-7.5,-0.65) 5(7.5,-0.65)
  round 1.3 hole 1.3 unplated: ""(-2.5,-1.95) ""(2.5,-1.95)
  silkscreen extent -7.32,-12.35 7.33,1.65, body extent -8.39,-12.45 8.39,3.07, height 7.95

## Part data
C1 C2 C3 C4 C5 C6 C8 C9 C10 C11 C13 C14 C15 C16 C18 C19 C20 C21 C22 C23 C25 C26 C28 C29 C30 C31 C34 C35 C38 C39 C40 C41 C42 C43 C44 C45 C46 C47 C48 C49 C50 C51 C52 C53 C54 C55 C56 C57 C58 C59 C61 C62 C63 C66 C67 C68: "Cap", BOM_Manufacturer="Huaxin S&T", BOM_Manufacturer Part=0603B103K101CT, BOM_Supplier=LCSC, BOM_Supplier Part=C302008, Contributor=LCSC, nameAlias=Capacitance, spicePre=C, spiceSymbolName=0603B103K101CT
C7 C12 C17 C24 C27 C60 C64 C65: "极性电容"
C32 C33 C36 C37: library part CAP, BOM_Manufacturer="Huaxin S&T", BOM_Manufacturer Part=0603B103K101CT, BOM_Supplier=LCSC, BOM_Supplier Part=C302008, Contributor=LCSC, nameAlias=Capacitance, spicePre=C, spiceSymbolName=0603B103K101CT
CN1 CN3: library part AudioCon3, "3.5mm 3Pin 音频接口", BOM_JLCPCB Part Class="Extended Part", BOM_Manufacturer=G-Switch(品赞), BOM_Manufacturer Part=PJ-393, BOM_Supplier=LCSC, BOM_Supplier Part=C2837065, Contributor=LCSC, spicePre=C, spiceSymbolName=PJ-393_C2837065
CN2: library part DC-20P, "DC牛角座，20P", BOM_JLCPCB Part Class="Extended Part", BOM_Manufacturer="Shenzhen Cankemeng", BOM_Manufacturer Part=-, BOM_Supplier=LCSC, BOM_Supplier Part=C132442, Contributor=LCSC, spicePre=C, spiceSymbolName=300S-20P
D1 D2 D3 D4 D9 D10 D11 D12 D13 D14 D15 D16 D17 D18 D19 D20 D21 D22 D23 D24 D25 D26 D27 D28: library part LED0, LatestRevisionDate=08-Jul-2005, LatestRevisionNote="Mech Layer 1 removed.", PackageDescription="LED; 2 Leads", PackageReference=LED-0, Published=8-Jun-2000, Publisher="Altium Limited"
D5 D6 D7 D8: "Schottky Rectifier", ComponentLink1Description="Manufacturer Link", ComponentLink1URL=http://www.irf.com/, ComponentLink2Description=Datasheet, ComponentLink2URL=http://www.irf.com/product-info/datasheets/data/10tq.pdf, DatasheetVersion=PD-2.057B, LatestRevisionDate=17-Jul-2002, LatestRevisionNote="Re-released for DXP Platform.", Note="Terminal 2 is the TAB and is electrically connected to the cathode", PackageDescription="TO, Thru-Hole, Vertical, Heatsink Mounted; 3 In-Line Leads (1 Absent); Pitch 2.54 mm", PackageReference=TO-220AC, PackageVersion=Feb-1998, Published=8-Jun-2000, Publisher="Altium Limited"
H1 H2 H4: "2Pin排针"
H3: "4Pin排针"
L1 L2: library part IND, "电感", BOM_JLCPCB Part Class="Extended Part", BOM_Manufacturer="Sunltech Tech", BOM_Manufacturer Part=SLO0630H150MTT, BOM_Supplier=LCSC, BOM_Supplier Part=C182182, Contributor=LCSC, nameAlias=Inductance, spicePre=L, spiceSymbolName=SLO0630H150MTT
R1 R2 R3 R4 R5 R6 R7 R8 R9 R11 R12 R13 R14 R16 R17 R19 R20 R21 R22 R23 R24 R25 R26 R27 R28 R29 R30 R31 R32 R33 R34 R35 R36 R37 R38 R39 R40 R41 R42 R43 R44 R45 R47 R48 R49 R50 R51 R52 R53 R54 R57 R58 R59 R60 R61 R62: library part Res, "电阻", BOM_Manufacturer="Viking Tech", BOM_Manufacturer Part=AR03BTCX1002A, BOM_Supplier=LCSC, BOM_Supplier Part=C465721, Contributor=LCSC, nameAlias="Resistance (Ohms)", spicePre=R, spiceSymbolName=AR03BTCX1002A
R10 R46 R55 R56: "可调电阻", LatestRevisionDate=17-Jul-2002, LatestRevisionNote="Re-released for DXP Platform.", PackageDescription="Variable Resistor, Thru-Hole; 3 Leads", PackageReference=VR3, Published=24-Mar-1999, Publisher="Altium Limited", Set Position=0.5, Sim Note="Enter the Resistance value and the set point into parameter fields."
R15 R18: "双联电位器"
S1: library part KEY_2P, "KEY-2Pp"
U1: "USB充电宝", BOM_JLCPCB Part Class="Extended Part", BOM_Manufacturer=INJOINIC, BOM_Manufacturer Part=IP5209, BOM_Supplier=LCSC, BOM_Supplier Part=C181695, Contributor=LCSC, spicePre=U, spiceSymbolName=IP5209
U2 U3 U11: "三端稳压(正电压)", BOM_JLCPCB Part Class="Extended Part", BOM_Manufacturer=HGSEMI(华冠), BOM_Manufacturer Part=LM7812T, BOM_Supplier=LCSC, BOM_Supplier Part=C2902509, Contributor=LCSC, spicePre=U, spiceSymbolName=LM7812T
U4: "升压PWM", BOM_JLCPCB Part Class="Extended Part", BOM_Manufacturer=SX, BOM_Manufacturer Part=SX1308, BOM_Supplier=LCSC, BOM_Supplier Part=C78162, sourceId=g4Yg9rJ1j, spicePre=U, spiceSymbolName=SX1308, timeStamp=1472247539
U5 U6: "三端稳压(负电压)", BOM_JLCPCB Part Class="Extended Part", BOM_Manufacturer=HGSEMI(华冠), BOM_Manufacturer Part=LM7812T, BOM_Supplier=LCSC, BOM_Supplier Part=C2902509, Contributor=LCSC, spicePre=U, spiceSymbolName=LM7812T
U7: "耳放", BOM_JLCPCB Part Class="Extended Part", BOM_Manufacturer=TI(德州仪器), BOM_Manufacturer Part=OPA4134UA, BOM_Supplier=LCSC, BOM_Supplier Part=C2832240, Contributor=LCSC, spicePre=U, spiceSymbolName=OPA4134UA
U8 U10: "音频差分放大器", BOM_JLCPCB Part Class="Extended Part", BOM_Manufacturer=TI(德州仪器), BOM_Manufacturer Part=DRV134UA, BOM_Supplier=LCSC, BOM_Supplier Part=C1519988, Contributor=LCSC, spicePre=U, spiceSymbolName=DRV134UA
U9: library part TPA6120, "耳放", BOM_Manufacturer=TI(德州仪器), BOM_Manufacturer Part=TPA6120A2DWP, BOM_Supplier=LCSC, BOM_Supplier Part=C2871054, Contributor=LCSC, link=https://atta.szlcsc.comnull, spicePre=U, spiceSymbolName=TPA6120A2DWP
U12 U13: "LM386", BOM_JLCPCB Part Class="Extended Part", BOM_Manufacturer="HTC Korea TAEJIN Tech", BOM_Manufacturer Part=LM386D, BOM_Supplier=LCSC, BOM_Supplier Part=C510560, Contributor=LCSC, spicePre=U, spiceSymbolName=LM386D
U14 U15: library part LM3915, "电平指示", BOM_JLCPCB Part Class="Extended Part", BOM_Manufacturer=XINLUDA(信路达), Frequency=-, BOM_Manufacturer Part=XD3915, BOM_Supplier=LCSC, BOM_Supplier Part=C609778, Contributor=LCSC, spicePre=U, spiceSymbolName=XD3915
USB1: library part USB_TYPEC_12P, "全引脚USB TYPEC母座", BOM_JLCPCB Part Class="Extended Part", BOM_Manufacturer=XUNPU(讯普), BOM_Manufacturer Part=TYPEC-304-ACP16, BOM_Supplier=LCSC, BOM_Supplier Part=C2982555, Contributor=LCSC, spicePre=U, spiceSymbolName=TYPEC-304-ACP16
USB2: library part USB-TYPEA, BOM_JLCPCB Part Class="Extended Part", BOM_Manufacturer=ValuePro, BOM_Manufacturer Part=YJ-USB-AF-SMT-01, BOM_Supplier=LCSC, BOM_Supplier Part=C8328, spicePre=U, spiceSymbolName=YJ-USB-AF-SMT-01

## Via types
v1: diameter 30, hole 16, Top Layer to Bottom Layer, tented both sides, 35 vias
v2: diameter 30, hole 16, Top Layer to Bottom Layer, 11 vias

## Nets (pads, with @x,y where several pads share a name; then routed paths per layer and width w, separated by ;. In a path a pad name is that pad's centre, name@x,y a point inside that pad or via, vN(x,y) a via of type N, cw(c..) or ccw(c..) an arc to the next point about the centre after c; other vN are vias at no path point)
A_LF+: C51.1 R20.1 R29.1 | length 210.8
  Top Layer w10: C51.1 4820,3154.21 v2(4820,3185) 4820,3211.59 R29.1
  Bottom Layer w10: v2@4821.17,3181.17 4834.68,3181.17 4840.86,3175 4904.63,3175 4934.29,3145.34 R20.1
A_LF-: C52.1 R17.2 R31.1 | length 919.1
  Top Layer w10: v2(4950,2810) 4950,2892.45 C52.1
  Top Layer w20: C52.1 4963.6,2906.05 4963.6,2988.95 R31.1
  Bottom Layer w10: R17.2 4858.87,3439.63 4781,3361.76 4781,2979 v2(4950,2810)
A_LIN: C50.1 CN1.2 CN1.3 CN2.11 R39.2 | length 1280.6
  Top Layer w10: CN1.3 5372.5,4851 5439.5,4784 CN1.2 5630,4771.5 v1(5630,4570) ; R39.2 5559.65,3871.13 5570.53,3882.01 5571.66,3882.01 5594.66,3905 5594.66,3922.28 5559.75,3957.19 C50.1 5559.75,3961.13 5625,4026.38 v1(5625,4415)
  Bottom Layer w10: v1(5625,4415) 5627.5,4417.5 5627.5,4567.5 v1(5630,4570)
A_LIN0+: C37.2 R18.3 R22.2 U7.9 | length 328.7
  Bottom Layer w10: R22.2 4861,3145.34 4871.88,3134.47 4871.88,3123.12 4895,3100 4967.56,3100 5002.28,3134.73 5002.28,3136.7 5013.03,3147.45 5016.97,3147.45 5029.41,3135 U7.9
A_LIN0-: C33.2 R14.2 R18.2 U7.13
A_LIN+: CN2.19 R18.4 R38.2 U10.13 U10.14 | length 985.5
  Top Layer w10: CN2.19 4871.85,3741.85 R38.2 U10.13 U10.14 U10.14@5038.94,3800
A_LIN-: CN2.17 R18.5 R37.1 U10.3 U10.4 | length 179.9
  Top Layer w20: U10.4 U10.3 5413.68,3800 5428.68,3785 R37.1
A_LOUT: CN2.7 CN3.2 CN3.3 R27.1 R41.2 R53.2 | length 2620.1
  Top Layer w10: v2(4300,3475) 4429.8,3475 4605,3650.2 4605,4696 4760,4851 CN3.3 4820,4851 4887,4784 CN3.2
  Bottom Layer w10: CN2.7 3816.65,3263.35 3853.81,3263.35 3886.6,3230.57 4023.4,3230.57 4055,3262.16 4055,3287.84 4094.95,3327.78 4120.62,3327.78 4153.61,3360.77 4153.61,3386.45 4242.16,3475 v2(4300,3475)
A_LOUT0: R27.2 R35.1 U9.2 | length 866.5
  Top Layer w10: R35.1 4770.35,2986.13 4715,3041.48 4715,3243.52 4770.35,3298.87 R27.2 4770.35,3301.13 4819.21,3350 5090,3350 5130,3310 5130,3282.48 5092.52,3245 U9.2
A_RF+: C53.1 R19.1 R30.1 | length 359.2
  Top Layer w10: R30.1 R30.1 C53.1@5734.7,3213.49 ; C53.1 C53.1 C53.1@5734.7,3213.49 ; v2(5780,3170) 5778.19,3170 C53.1@5734.7,3213.49
  Bottom Layer w10: R19.1 5619.39,3196.3 5645.69,3170 v2(5780,3170)
A_RF-: C54.1 R16.2 R32.1 | length 984
  Top Layer w10: C54.1 5532.44,2918.03 5557.19,2893.28 5773.28,2893.28 v1(5795,2915)
  Top Layer w20: R32.1 5525,2989.66 5525,2929.41 5532.44,2921.97 C54.1
  Bottom Layer w10: R16.2 5810,3207.55 5810,2930.86 5795,2915.86 v1(5795,2915)
A_RIN: C47.1 CN1.4 CN2.9 R25.2 | length 3917.6
  Top Layer w10: CN2.9 3951.62,3321.62 4014.46,3321.62 4060.57,3367.73 4060.57,3393.4 4197.16,3530 4445,3530 4575,3660 4575,4765 4873,5063 5262.39,5063 5301.39,5024 CN1.4
  Top Layer w20: R25.2 R25.2 5564.7,4429.11 C47.1 5564.75,4431.13 5705,4571.38 5705,4966.5 5647.5,5024 CN1.4
A_RIN0+: C36.1 R15.3 R21.1 U7.6 | length 3794.6
  Top Layer w10: R15.3 2756.88,2240 2770.74,2253.86 2770.74,2255.74 2775,2260 2775,2269.14 2866.36,2360.5 3267.57,2360.5 3524,2616.93 3524,3109.2 3584.8,3170 4594.73,3170 4814.73,3390 5175,3390 v2(5270,3295)
  Bottom Layer w10: v2(5270,3295) 5270,3292.87 5327.87,3235 U7.6 5379.65,3235 5415.65,3199 5455.12,3199 5457.72,3196.4 C36.1 5496.97,3196.4 5535.57,3235 5625.17,3235 5663.87,3196.3 R21.1
A_RIN0-: C32.1 R13.1 R15.2 U7.2 | length 3795.3
  Top Layer w10: R15.2 2686,2240 2820.5,2374.5 3261.77,2374.5 3510,2622.73 3510,3115 3580,3185 4589.93,3185 4839.93,3435 v2(5280,3435)
  Bottom Layer w10: v2(5280,3435) U7.2 5490.25,3435 C32.1 5496.76,3439.54 5522.22,3465 5638.5,3465 5663.87,3439.63 R13.1
A_RIN+: CN2.15 R15.4 R24.2 U8.13 U8.14 | length 3748.6
  Top Layer w10: R15.4 2844,2240 2879,2275 3067.77,2275 3087.77,2255 3332.73,2255 3538,2460.27 3538,3103.4 3588.6,3154 4056,3154 v2(4080,3130) ; v2(4695,4040) 4695,4107.02 4868.48,4280.5 R24.2@4876.35,4280.5
  Top Layer w20: R24.2@4876.35,4280.5 5002.48,4280.5 U8.14 U8.13
  Bottom Layer w10: v2(4080,3130) 4080,3144.87 4205,3269.87 CN2.15 4216.65,3286.65 4253.81,3286.65 4294.35,3327.19 4320.03,3327.19 4353.31,3360.47 4353.31,3386.15 4402.16,3435 4440,3435 4477.4,3472.4 4477.4,3477.4 4695,3695 v2(4695,4040)
A_RIN-: CN2.13 R15.5 R23.1 U8.3 U8.4 | length 4902.1
  Top Layer w10: R15.5 3337.53,2240 3552,2454.47 3552,3097.6 3584.4,3130 v2(4035,3130) ; CN2.13 4151.62,3321.62 4214.46,3321.62 4249.43,3356.6 4249.43,3419.43 4275,3445 4419.6,3445 4620,3645.4 4620,4675 4675,4730 4935,4730 5329.44,4335.56 5332.09,4335.56 5337.65,4330 U8.4
  Top Layer w20: U8.4 U8.3 5377.52,4279.5 5500.84,4279.5 R23.1
  Bottom Layer w10: v2(4035,3130) 4105,3200 CN2.13
A_ROUT: CN2.5 CN3.4 R28.2 R42.2 R54.2 | length 3131.3
  Top Layer w10: CN2.5 3749.43,3230.57 4030.57,3230.57 4060.57,3260.57 4060.57,3293.4 4097.73,3330.57 4123.4,3330.57 4160.57,3367.73 4160.57,3393.4 4267.16,3500 4435,3500 4590,3655 4590,4760 4854,5024 CN3.4
  Bottom Layer w10: R42.2 3101.13,2870.34 3200,2771.48 3200,2675 3245.33,2629.67 3245.33,2609.33 R54.2
A_ROUT0: R28.1 R36.1 U9.19 | length 894.2
  Top Layer w10: U9.19 5407.48,3245 5384.14,3268.34 5384.14,3308.01 5411.13,3335 5690.79,3335 5734.65,3291.13 R28.1 5739.64,3285.02 5764.98,3285.02 5810,3240 5810,3015 5770,2975 R36.1
A_VLB12V+: C12.1 C15.1 C16.1 C40.2 C41.2 C42.2 C43.2 CN2.2 U2.3 U9.3 U9.18 | length 952.2
  Top Layer w20: C42.2 C43.2 4965.36,3142.62 4971.11,3148.36 4990.77,3148.36 5037.4,3195 U9.3 ; U9.18 5462.6,3195 5509.02,3148.58 5526.42,3148.58 5532.17,3142.83 C41.2 C40.2
  Top Layer w30: C12.1 3863,3911.25 3990,3911.25 ; U2.3 4026.25,4062.69 3990,4026.44 3990,3911.25 ; C15.1 C16.1 4074.25,3868.47 4032.78,3868.47 3990,3911.25
A_VLB12V-: C24.2 C25.1 C26.1 C38.2 C39.2 C44.2 C45.2 CN2.4 U5.3 U9.1 U9.20 | length 910.2
  Top Layer w20: C44.2 C45.2 U9.1 ; U9.20 5435.15,3295.11 5532.06,3295.11 C38.2 C39.2
  Top Layer w30: C24.2 2608.55,3913 ; U5.3 2695,3999.45 2608.55,3913 ; C25.1 C26.1 2654.1,3867.45 2608.55,3913
GND: C1.2 C2.2 C3.2 C4.2 C6.2 C7.2 C8.2 C9.2 C10.2 C11.2 C12.2 C13.2 C14.2 C15.2 C16.2 C17.2 C18.2 C19.2 C20.2 C22.2 C23.2 C24.1 C25.2 C26.2 C27.1 C28.2 C29.2 C30.2 C31.2 C34.1 C35.1 C38.1 C39.1 C40.1 C41.1 C42.1 C43.1 C44.1 C45.1 C46.2 C48.1 C49.2 C51.2 C52.2 C53.2 C54.2 C55.1 C58.1 C59.1 C60.2 C61.2 C62.2 C63.2 C66.2 C67.2 C68.2 CN1.1 CN1.5 CN2.16 CN2.18 CN2.20 CN3.1 CN3.5 D7.1 H2.1 H3.1 H4.1 R1.2 R4.2 R8.2 R9.1 R12.1 R15.1 R15.6 R18.1 R18.6 R23.2 R24.1 R25.1 R26.1 R33.1 R34.1 R37.2 R38.1 R39.1 R40.1 R48.2 R55.2 R56.2 R58.2 R59.2 R61.2 R62.2 S1.1 U1.7 U1.12 U1.25 U2.2 U3.2 U4.2 U5.1 U6.1 U7.3 U7.5 U7.10 U7.12 U8.5 U9.21 U10.5 U11.2 U12.2 U12.4 U13.2 U13.4 U14.2 U14.4 U14.8 U15.2 U15.4 U15.8 USB1.A1B12 USB1.B1A12 USB1.EP USB2.4 USB2.5
NetC21_2: C21.2 D6.1 D7.2 | length 299.6
  Top Layer w25: D6.1 D7.2 4490,4616.16 4525,4651.16 C21.2
NetC32_2: C32.2 R13.2 R16.1 U7.1 | length 318.1
  Bottom Layer w10: U7.1 5485.14,3485 C32.2 5573.63,3494.65 R16.1 R13.2
NetC33_1: C33.1 R14.1 R17.1 U7.14 | length 333.7
  Bottom Layer w10: R17.1 R14.1 5010.1,3498.94 C33.1 5016.97,3494.04 5067.72,3443.28 5067.72,3427.63 5110.35,3385 U7.14
NetC36_2: C36.2 R19.2 R21.2 U7.7 | length 332.2
  Bottom Layer w10: U7.7 5449.32,3185 5493.03,3141.29 C36.2 5499.29,3136.99 R19.2 R21.2
NetC37_1: C37.1 R20.2 R22.1 U7.8 | length 521.5
  Bottom Layer w10: R22.1 R20.2 5012.9,3204.66 C37.1 5016.97,3202.55 5056.12,3163.4 5165.33,3163.4 5193.74,3135 U7.8
NetC47_2: C47.2 R26.2 U8.6 | length 200.9
  Top Layer w20: U8.6 5377.44,4429.58 5505.77,4429.58 5507.49,4431.31 5507.49,4497.85 R26.2
NetC50_2: C50.2 R40.2 U10.6 | length 215.2
  Top Layer w20: U10.6 5497.45,3950 5504.64,3957.19 5502.49,3959.34 5502.49,4037.85 R40.2
NetC56_1: C56.1 U12.1
NetC56_2: C56.2 U12.8
NetC57_1: C57.1 U13.1
NetC57_2: C57.2 U13.8
NetC58_2: C58.2 U12.7
NetC59_2: C59.2 U13.7
NetC64_1: C64.1 R43.1 U12.5
NetC65_1: C65.1 R44.1 U13.5
NetD1_1: D1.1 D2.2 U1.24 | length 404.2
  Top Layer w10: D2.2 2645,5220 2645,5081.46 2650.86,5075.6 2655.28,5075.6 2655.79,5075.09 U1.24
  Top Layer w20: D1.1 2475,5270 2595,5270 D2.2
NetD1_2: D1.2 D2.1 D3.2 D4.1 U1.2 | length 655.7
  Top Layer w10: v1(2570,5175) 2570,5020.86 2581.33,5009.53 U1.2
  Top Layer w20: D1.2 D2.1 v1(2570,5175) ; v1(2760,5175) D3.2 D4.1
  Bottom Layer w20: v1(2570,5175) v1(2760,5175)
NetD3_1: D3.1 D4.2 U1.1 | length 507.1
  Top Layer w10: v1(2615,5144) 2615,5036.11 U1.1 ; v1(2700,5145) D3.1
  Top Layer w20: D3.1 2735,5270 2850,5270 D4.2
  Bottom Layer w10: v1(2615,5144) 2616,5145 v1(2700,5145)
NetD8_1: D8.1 R48.1
NetD8_2: D8.2 R45.1 R46.2 R47.1
NetD9_1: D9.1 U14.1
NetD9_2: D9.2 D11.2 D13.2 D15.2 D17.2 D19.2 D21.2 D23.2 D25.2 D27.2 R49.1 R50.1
NetD10_1: D10.1 U15.1 | length 752.8
  Bottom Layer w10: U15.1 3370,2590 3370,2292.27 3265,2187.27 D10.1
NetD10_2: D10.2 D12.2 D14.2 D16.2 D18.2 D20.2 D22.2 D24.2 D26.2 D28.2 R51.1 R52.1 | length 3088.3
  Bottom Layer w15: D26.2 2515,2012.5 2490,2012.5 D28.2 ; D22.2 2706.25,2012.5 2687.5,2012.5 D24.2 ; D18.2 2897.5,2012.5 2885,2012.5 D20.2 ; R52.1 R51.1 2895.34,2545.34 2830,2480 2375,2480 2350,2455 2350,1918.79 2358.79,1910 2387.5,1910 D28.2 ; D14.2 3125.25,2049 3119,2049 D16.2 ; D10.2 3226.5,1959 3226.5,1956.5 3195,1925 3080,1925 3046,1959 D16.2 ; D28.2 2487.5,1925 2600,1925 D24.2 ; D24.2 2685,1925 2797.5,1925 D20.2 ; D20.2 2877.5,1930 3000,1930 D16.2
NetD11_1: D11.1 U14.18
NetD12_1: D12.1 U15.18 | length 476.5
  Bottom Layer w10: D12.1 3215.25,2007.75 3215.25,2052.48 3245,2082.23 U15.18
NetD13_1: D13.1 U14.17
NetD14_1: D14.1 U15.17 | length 387.4
  Bottom Layer w10: D14.1 3145.5,2129.25 3145.5,2414.5 U15.17
NetD15_1: D15.1 U14.16
NetD16_1: D16.1 U15.16 | length 475.5
  Bottom Layer w10: D16.1 3045,2035 U15.16
NetD17_1: D17.1 U14.15
NetD18_1: D18.1 U15.15 | length 389.2
  Bottom Layer w10: D18.1 2952,2127 2952,2408 U15.15
NetD19_1: D19.1 U14.14
NetD20_1: D20.1 U15.14 | length 474.4
  Bottom Layer w10: D20.1 2795,1982.5 2795,2298.33 2845,2348.33 U15.14
NetD21_1: D21.1 U14.13
NetD22_1: D22.1 U15.13 | length 380.1
  Bottom Layer w10: D22.1 2716.39,2082.64 2716.39,2191.04 2716,2191.43 2716,2299.82 2745,2328.82 U15.13
NetD23_1: D23.1 U14.12
NetD24_1: D24.1 U15.12 | length 510.7
  Bottom Layer w10: D24.1 2590,1975 2590,2110 2545,2155 2545,2310 2645,2410 U15.12
NetD25_1: D25.1 U14.11
NetD26_1: D26.1 U15.11 | length 376.1
  Bottom Layer w10: D26.1 2500,2370 U15.11
NetD27_1: D27.1 U14.10
NetD28_1: D28.1 U15.10 | length 472.4
  Bottom Layer w10: D28.1 2445,2027.5 U15.10
NetH3_3: H3.3 R11.2 | length 106.4
  Top Layer w25: R11.2 3175,4359.47 3195,4339.47 H3.3
NetR1_1: R1.1 R2.1 U1.23 | length 426.1
  Top Layer w10: R2.1 R1.1@2405.34,5153.87 ; R1.1 R1.1@2405.34,5153.87 ; v1(2520,5110) 2449.21,5110 R1.1@2405.34,5153.87 ; v1(2675,5120) 2675.47,5119.53 U1.23
  Bottom Layer w10: v1(2520,5110) 2655,5110 2665,5120 v1(2675,5120)
NetR4_1: R4.1 U1.5 | length 172.8
  Top Layer w10: R4.1 2527.49,4925 2552.96,4950.47 U1.5
NetR7_2: R7.2 R8.1 U1.6 | length 266.5
  Top Layer w10: R8.1 2459.31,4849.65 R7.2 2459.66,4851.13 2470.53,4862.01 2505.58,4862.01 2574.36,4930.79 U1.6
NetR29_2: R29.2 R33.2 U9.4 | length 740.2
  Top Layer w10: R33.2 R33.2@4770.35,3064.88 ; R29.2 4770.35,3220.12 4759.47,3209.24 4758.34,3209.24 4734.1,3185 4734.1,3101.13 R33.2@4770.35,3064.88 ; U9.4 5068.44,3148.47 5113.47,3148.47 5130,3165 5130,3207.52 5117.52,3220 5026.05,3220 4981.05,3175 4890,3175 4871.05,3156.05 4871.05,3143.96 4827.57,3100.49 4810.49,3100.49 4785.76,3075.76 4781.22,3075.76 R33.2@4770.35,3064.88
NetR30_2: R30.2 R34.2 U9.17 | length 595.7
  Top Layer w10: U9.17 5365.86,3145 5360,3150.86 5360,3210 5370,3220 5475,3220 5510,3185 5589.33,3185 5641.83,3132.5 R30.2 5675.35,3131.37 5728.78,3077.93 5728.78,3059.63 R34.2
NetR31_2: R31.2 R35.2 U9.5 | length 289
  Top Layer w20: R35.2 4832.15,2987.5 4902.85,2987.5 R31.2 4905.35,2991.13 4939.5,3025.29 4980.44,3025.29 5005.88,3050.72 5005.88,3063.47 5037.4,3095 U9.5
NetR32_2: R32.2 R36.2 U9.16 | length 296
  Top Layer w10: U9.16 5462.6,3095 5469.41,3088.19 5469.41,3080.25 5527.54,3022.12 5553.66,3022.12 5584.65,2991.13 R32.2
  Top Layer w20: R32.2 5661.48,2990 5675.35,2976.13 R36.2
NetR41_1: R41.1 U12.3
NetR42_1: R42.1 U13.3
NetR53_1: R53.1 R55.1
NetR54_1: R54.1 R56.1 | length 261.9
  Bottom Layer w10: R54.1 3250,2467.27 3285.5,2431.77 3285.5,2316.5 R56.1
NetR55_3: R55.3 U14.5
NetR56_3: R56.3 U15.5 | length 1011.1
  Bottom Layer w10: U15.5 2895,2765 3160,2765 3182.07,2742.93 3185,2740 3185,2721.32 cw(c3145,2715) 3185,2708.68 3185,2421.32 cw(c3145,2415) 3185,2408.68 3185,2122 3187.93,2119.07 R56.3
NetR57_1: R57.1 R58.1 U14.6
NetR59_1: R59.1 U14.7
NetR60_1: R60.1 R61.1 U15.6 | length 259
  Bottom Layer w10: R60.1 R60.1@2711.69,2604.66 ; U15.6 2745,2637.96 R60.1@2711.69,2604.66 ; R61.1 R60.1@2711.69,2604.66
NetR62_1: R62.1 U15.7 | length 139.7
  Bottom Layer w10: R62.1 2576.83,2604.66 2638.69,2666.51 2638.69,2708.69 U15.7
PWR_5V: C20.1 C62.1 C63.1 CN2.10 H3.2 L2.2 R5.2 U4.4 U4.5 U12.6 U13.6 | length 790.9
  Top Layer w30: R5.2 2609.31,4391.37 2745,4255.68 v1(2765,4235.68) v1(2884.32,4235.68) 3034.32,4235.68 v1(3035,4235) v1(3175,4235) 3200,4235 H3.2
  other v1: 4445,4995 4495,4995 4445,5047.5 4495,5047.5 4445,5100 4495,5100
PWR_BAT: C3.1 C4.1 C13.1 C14.1 H2.2 R3.2 R6.2 U1.9 U1.10 | length 866.4
  Top Layer w20: H2.2 2435,4640 2545,4640 C13.1 C13.1@2551.97,4635 ; R6.2 2609.31,4524.83 2595,4539.14 2595,4591.97 C13.1@2551.97,4635 ; 2705,4896.9 2705,4864.02 2666.78,4825.8 R3.2 2666.78,4752.6 2636,4721.82 C14.1 ; C3.1 C4.1 C14.1 ; C13.1@2551.97,4635 C14.1
PWR_BCSA: C1.1 C2.1 L1.1 R3.1 U1.11 | length 634.4
  Top Layer w15: U1.11 2734.53,4820.72 2783.22,4772.03 R3.1 2801.99,4743.55 2801.99,4725.04 2892.03,4635 C2.1 C1.1 2990.24,4624.76 L1.1
PWR_DC_FB: R10.1 R10.3 R12.2 U4.3 | length 1169.9
  Top Layer w10: R12.2 3825.34,4390.35 R10.1 3954.5,4519.5 R10.3 3954.5,4974.5 4205.12,5225.12 U4.3
PWR_DC_SW: C21.1 D5.2 L2.1 U4.1 | length 1006.7
  Top Layer w25: D5.2 4230,4616.16 4250.96,4637.13 4254.08,4637.13 4325,4708.05 L2.1 4500.24,4794.76 4526.28,4820.8 4530.22,4820.8 4530.22,4822.77 4549.88,4842.43 4549.88,5210.48 4535.23,5225.12 U4.1
PWR_DC_V5+: C17.1 C18.1 C19.1 C34.2 C46.1 C49.1 CN2.6 U3.3 U7.4 U8.12 U10.12 | length 1885.5
  Top Layer w20: C49.1 4871.94,3932.72 4904.66,3900 U10.12 5139.1,3900 v1(5219.1,3820) ; C46.1 4953.51,4367.19 4966.32,4380 U8.12 v1(5110,4380)
  Top Layer w30: C17.1 2978,3908.75 3115,3908.75 ; U3.3 3138.75,4053.39 3115,4029.64 3115,3908.75 ; C18.1 C19.1 3184.25,3868.47 3156.53,3868.47 3116.25,3908.75 3115,3908.75
  Bottom Layer w20: v1(5219.1,3820) 5220,3819.1 5220,3440.75 5325.75,3335 U7.4 5429.69,3335 5439.69,3345 C34.2
PWR_DC_V5-: C27.2 C28.1 C29.1 C35.2 C48.2 C55.2 CN2.8 U6.3 U7.11 U8.11 U10.11 | length 3919.1
  Top Layer w20: C48.2 4951.32,4445 4966.32,4430 U8.11 5148.28,4430 5160,4418.28 5160,4071.06 U10.11@5038.94,3950 ; v2(4875,4095) 4875,4017.45 C55.2 4872.56,4013.03 4878.3,4007.28 4909.74,4007.28 4967.03,3950 U10.11 U10.11@5038.94,3950 ; v2(5115,3955) 5112.29,3955 5107.29,3950 U10.11@5038.94,3950
  Top Layer w30: CN2.8 3815,3375 4002.25,3562.25 4112.25,3562.25 4201.84,3651.84 4201.84,3809.84 4269.04,3877.04 4300.38,3877.04 4305,3881.66 C27.2 4403,3913 ; U6.3 4470,3980 4403,3913 ; C29.1 C28.1 4448.28,3867.72 4403,3913
  Bottom Layer w20: U6.3 4482.89,4093.09 4873.09,4093.09 v2(4875,4095) ; C35.2 5016.97,3297.45 5022.72,3291.7 5022.72,3289.73 5077.44,3235 U7.11 5163.25,3235 5190.1,3261.85 5190.1,3879.9 v2(5115,3955)
PWR_DC_VHN: C30.1 C31.1 D6.2 U5.2 U6.2 | length 504.2
  Top Layer w20: D6.2 4370,4424.1 4370,4315 ; U6.2 4370,4315 ; C31.1 C30.1 4409.63,4315 4370,4315
PWR_DC_VHP: C22.1 C23.1 D5.1 R10.2 U2.1 U3.1 U11.1 | length 1910
  Top Layer w30: U3.1 2938.75,4095.55 3003.2,4160 3382.57,4160 ; U11.1 3382.5,4159.93 3382.57,4160 ; U2.1 3826.25,4095.55 3836.39,4105.7 3890.7,4160 ; D5.1 D5.1@4218.11,4421.5 ; C22.1 C23.1 4204.79,4408.17 D5.1@4218.11,4421.5 ; 3382.57,4160 3890.7,4160 ; 3890.7,4160 3918.89,4188.19 4053.5,4322.8 R10.2 D5.1@4218.11,4421.5
PWR_KEY: CN2.14 S1.2 U1.8 | length 601.2
  Top Layer w10: v1(2575,4763.93) 2675.47,4864.4 U1.8 ; v1(2670,4490) 2702.2,4457.8 S1.2
  Bottom Layer w10: v1(2575,4763.93) 2670,4668.93 v1(2670,4490)
PWR_OUTDM: U1.18 USB2.2 | length 1417.6
  Top Layer w10: U1.18 2829.21,5029.21 v1(2890,5090) ; v1(2890,5180) 3615,5180 3812.99,4982.01 USB2.2
  Bottom Layer w10: v1(2890,5090) v1(2890,5180)
PWR_OUTDP: U1.19 USB2.3 | length 1397.2
  Top Layer w10: U1.19 2754.21,5075.09 2754.72,5075.6 2812.89,5075.6 2822.29,5085 v1(2825,5085) ; v1(2820,5175) 2840,5155 3610,5155 3734.19,5030.81 USB2.3
  Bottom Layer w10: v1(2820,5175) 2825,5170 v1(2825,5085)
PWR_SW: C5.2 L1.2 U1.13 U1.14 U1.15 | length 490.9
  Top Layer w20: C5.2 2865,4820 2935,4750 3074.18,4750 3169.41,4845.23 L1.2
PWR_USB_DM: CN2.3 USB1.A7 USB1.B7 | length 129.4
  Top Layer w10: USB1.A7 3136.06,5015.21 3136.06,4972.98 3141.92,4967.12 3167.76,4967.12 3173.62,4972.98 3173.62,5015.21 USB1.B7
PWR_USB_DP: CN2.1 USB1.A6 USB1.B6 | length 134.6
  Top Layer w10: USB1.B6 3116.38,5017.02 3116.38,5061.86 3122.24,5067.72 3148.08,5067.72 3153.94,5061.86 3153.94,5017.02 USB1.A6
PWR_VIN: C8.1 C9.1 U1.20 U1.21 USB1.A4B9 USB1.B4A9 | length 903.1
  Top Layer w20: 2725,5060 2725,5076.7 2774.14,5125.83 3037.57,5125.83 3068.4,5095 3089.28,5095 ; C9.1 C8.1 3022.55,4916.97 3050.51,4944.93 USB1.B4A9 3052.32,5017.93 3052.32,5058.04 3089.28,5095 ; USB1.A4B9 3237.68,5017.93 3237.68,5058.04 3200.72,5095 3089.28,5095
PWR_VOUT: C5.1 C7.1 C10.1 C11.1 CN2.12 H3.4 R11.1 U1.16 U1.17 USB2.1 | length 1108.1
  Top Layer w20: v1(3065,4465) 3040,4490 v1(3040,4520) v1(3095,4520) 3127.54,4487.46 R11.1 3177.45,4485.01 3242.55,4485.01 C10.1 C11.1 3326.97,4482.56 3389.41,4545 C7.1 3510,4545 3575,4610 3786.12,4610 3911.39,4735.27 USB2.1
  other v1: 2835,5005 2865,5005 2895,5005
PWR_VREG: C6.1 R2.2 R7.1 U1.3 U1.4 | length 491.1
  Top Layer w10: R7.1 2400.34,4851.13 2360,4891.48 2360,4930.27 2394.73,4965 2421.56,4965 C6.1@2459.75,5003.19 ; R2.2 2464.66,5010.06 C6.1 C6.1@2459.75,5003.19 ; U1.4 U1.3 2473.1,4989.84 C6.1@2459.75,5003.19
PWR_VUB+: H1.2 R5.1 R6.1 | length 195.6
  Top Layer w20: H1.2 2433.75,4396.25 2546.25,4396.25 R5.1 R6.1
PWR_VUB-: H1.1 R9.2 U1.22 | length 1248.6
  Top Layer w10: R9.2 2609.31,4318.87 2658.18,4270 v1(2670,4270) ; U1.22 2695.67,5063.61 2695.67,5079.66 2731.17,5115.17 2731.17,5126.17 v1(2735,5130)
  Top Layer w20: H1.1 2505.33,4300 2516.34,4288.99 2579.43,4288.99 R9.2@2609.31,4318.87
  Bottom Layer w10: v1(2670,4270) 2735,4335 v1(2735,5130)
VU_12V: C60.1 C61.1 C67.1 C68.1 R49.2 R50.2 R51.2 R52.2 R57.2 R60.2 U11.3 U14.3 U14.9 U15.3 U15.9 | length 1365.8
  Top Layer w30: C60.1 3421.31,3916.81 3517.78,3916.81 ; U11.3 3582.5,3981.53 3517.78,3916.81 ; C61.1 3614.25,3916.81 3517.78,3916.81
  Bottom Layer w15: C68.1 2450.25,2605 2520,2605 2549.83,2575.17 2595.02,2575.17 2624.85,2545.34 R60.2 2796.27,2545.34 2823.65,2572.72 2882.72,2572.72 2914.66,2604.66 R51.2 R52.2 3115.14,2644.86 U15.3
  Bottom Layer w30: C68.1 U15.9
VU_LOUT: C64.2 R43.2 R45.2
VU_OUT: C66.1 H4.2 R46.1 R46.3
VU_ROUT: C65.2 R44.2 R47.2
pads on no net: U4.6 U7.15 U7.16 U8.1 U8.2 U8.7 U8.8 U8.9 U8.10 U8.15 U8.16 U9.6 U9.7 U9.8 U9.9 U9.10 U9.11 U9.12 U9.13 U9.14 U9.15 U10.1 U10.2 U10.7 U10.8 U10.9 U10.10 U10.15 U10.16 USB1. USB1.A5 USB1.A8 USB1.B5 USB1.B8 USB2.

## Polygon pours and split planes (outlines as drawn)
PWR_5V on Top Layer "PWR_5V_L01_P002" (solid, pour order 2): 4220,5140 4515,5140 4515,4965 4220,4965
PWR_VOUT on Top Layer "PWR_VOUT_L01_P001" (solid, pour order 1): 2775,4985 2835,4985 2850,4970 2885,4970 2885,5015 2770,5015
PWR_SW on Top Layer "PWR_SW_L01_P000" (solid, pour order 0): 2770,4975 2810,4965 2880,4930 2885,4925 2885,4895 2770,4895
GND on GND_2 (split plane): 5891.9,1782.1 4812.1,1782.1 4812.1,1922 4811.71,1925.92 4810.57,1929.69 4808.71,1933.17 4806.21,1936.21 4803.17,1938.71 4799.69,1940.57 4795.92,1941.71 4792,1942.1 4602.1,1942.1 4602.1,3103 4601.71,3106.92 4600.57,3110.69 4598.71,3114.17 4596.21,3117.21 4593.17,3119.71 4589.69,3121.57 4585.92,3122.71 4582,3123.1 3580,3123.1 3576.08,3122.71 3572.31,3121.57 3568.83,3119.71 3565.79,3117.21 3563.29,3114.17 3561.43,3110.69 3560.29,3106.92 3559.9,3103 3559.9,1942.1 3370,1942.1 3366.08,1941.71 3362.31,1940.57 3358.83,1938.71 3355.79,1936.21 3353.29,1933.17 3351.43,1929.69 3350.29,1925.92 3349.9,1922 3349.9,1782.1 2270.1,1782.1 2270.1,5291.9 5891.9,5291.9
PWR_DC_V5+ on VCC3 (split plane): 5891.9,1782.1 4812.1,1782.1 4812.1,1922 4811.71,1925.92 4810.57,1929.69 4808.71,1933.17 4806.21,1936.21 4803.17,1938.71 4799.69,1940.57 4795.92,1941.71 4792,1942.1 4602.1,1942.1 4602.1,3103 4601.71,3106.92 4600.57,3110.69 4598.71,3114.17 4596.21,3117.21 4593.17,3119.71 4589.69,3121.57 4585.92,3122.71 4582,3123.1 3580,3123.1 3576.08,3122.71 3572.31,3121.57 3568.83,3119.71 3565.79,3117.21 3563.29,3114.17 3561.43,3110.69 3560.29,3106.92 3559.9,3103 3559.9,1942.1 3370,1942.1 3366.08,1941.71 3362.31,1940.57 3358.83,1938.71 3355.79,1936.21 3353.29,1933.17 3351.43,1929.69 3350.29,1925.92 3349.9,1922 3349.9,1782.1 2270.1,1782.1 2270.1,3619.92 2270.19,3619.9 4595,3619.9 4596.95,3620.29 4598.6,3621.4 4603.6,3626.4 4604.71,3628.05 4605.1,3630 4605.1,4160 4605.1,5290 4604.72,5291.9 5891.9,5291.9
PWR_5V on VCC3 (split plane): 4594.9,4165.1 2270.1,4165.1 2270.1,4289.9 4165,4289.9 4166.95,4290.29 4168.6,4291.4 4169.71,4293.05 4170.1,4295 4170.1,5286.81 4594.9,5286.81
PWR_DC_VHN on VCC3 (split plane): 4594.9,3632.11 4592.89,3630.1 2275.19,3630.1 2275.19,4154.9 4594.9,4154.9
PWR_VOUT on VCC3 (split plane): 4159.9,4300.1 2275.19,4300.1 2275.19,5286.81 4159.9,5286.81

## Other copper
VCC3 (plane layer: these items are gaps in the copper):
  lines w10: 2260,4160 4600,4160 ; 2270.1,4154.9 2270.1,3625.1 2270.19,3625 4595,3625 4600,3630 4600,4160 ; 4166.9,5291.9 4598.1,5291.9 4600,5290 4600,4160 ; 4166.9,5291.9 4165,5290 4165,4295 2270,4295 2270.1,4295.1 2270.1,5291.9 4166.9,5291.9

## Silkscreen, mask and mechanical layers (free items; w line width, h text height)
Top Overlay:
  rectangle: 5812,1762 5912,5312
  rectangle: 2250,1762 2350,5312
  lines w10: 2260,3620 5910,3620 ; 2345,4155 4600,4155 ; 4600,3620 4600,3985 4600,5310
Bottom Overlay:
  rectangle: 5812,1762 5912,5312
  rectangle: 2250,1762 2350,5312
Mechanical 1:
  the board outline again, w10

## Text inside footprints (layer, text, board x,y; h text height)
C7: Top Overlay "+" at 3460,4590 h30
C12: Top Overlay "+" at 3906.25,3880 h30 r270
C17: Top Overlay "+" at 3018.75,3880 h30 r270
C24: Top Overlay "+" at 2485,3740 h30 r90
C27: Top Overlay "+" at 4260,3740 h30 r90
C60: Top Overlay "+" at 3462.5,3880 h30 r270
C64: Top Overlay "+" at 2640,3295 h30 r90
C65: Top Overlay "+" at 3020,3295 h30 r90
U2: Bottom Overlay "HOT" at 3846.25,4440 h60 r180
U3: Bottom Overlay "HOT" at 2958.75,4440 h60 r180
U5: Bottom Overlay "HOT" at 2515,4440 h60 r180
U6: Bottom Overlay "HOT" at 4290,4440 h60 r180
U11: Bottom Overlay "HOT" at 3402.5,4440 h60 r180